# EAGLE board backplane_v4 (EAGLE 8.0.1)
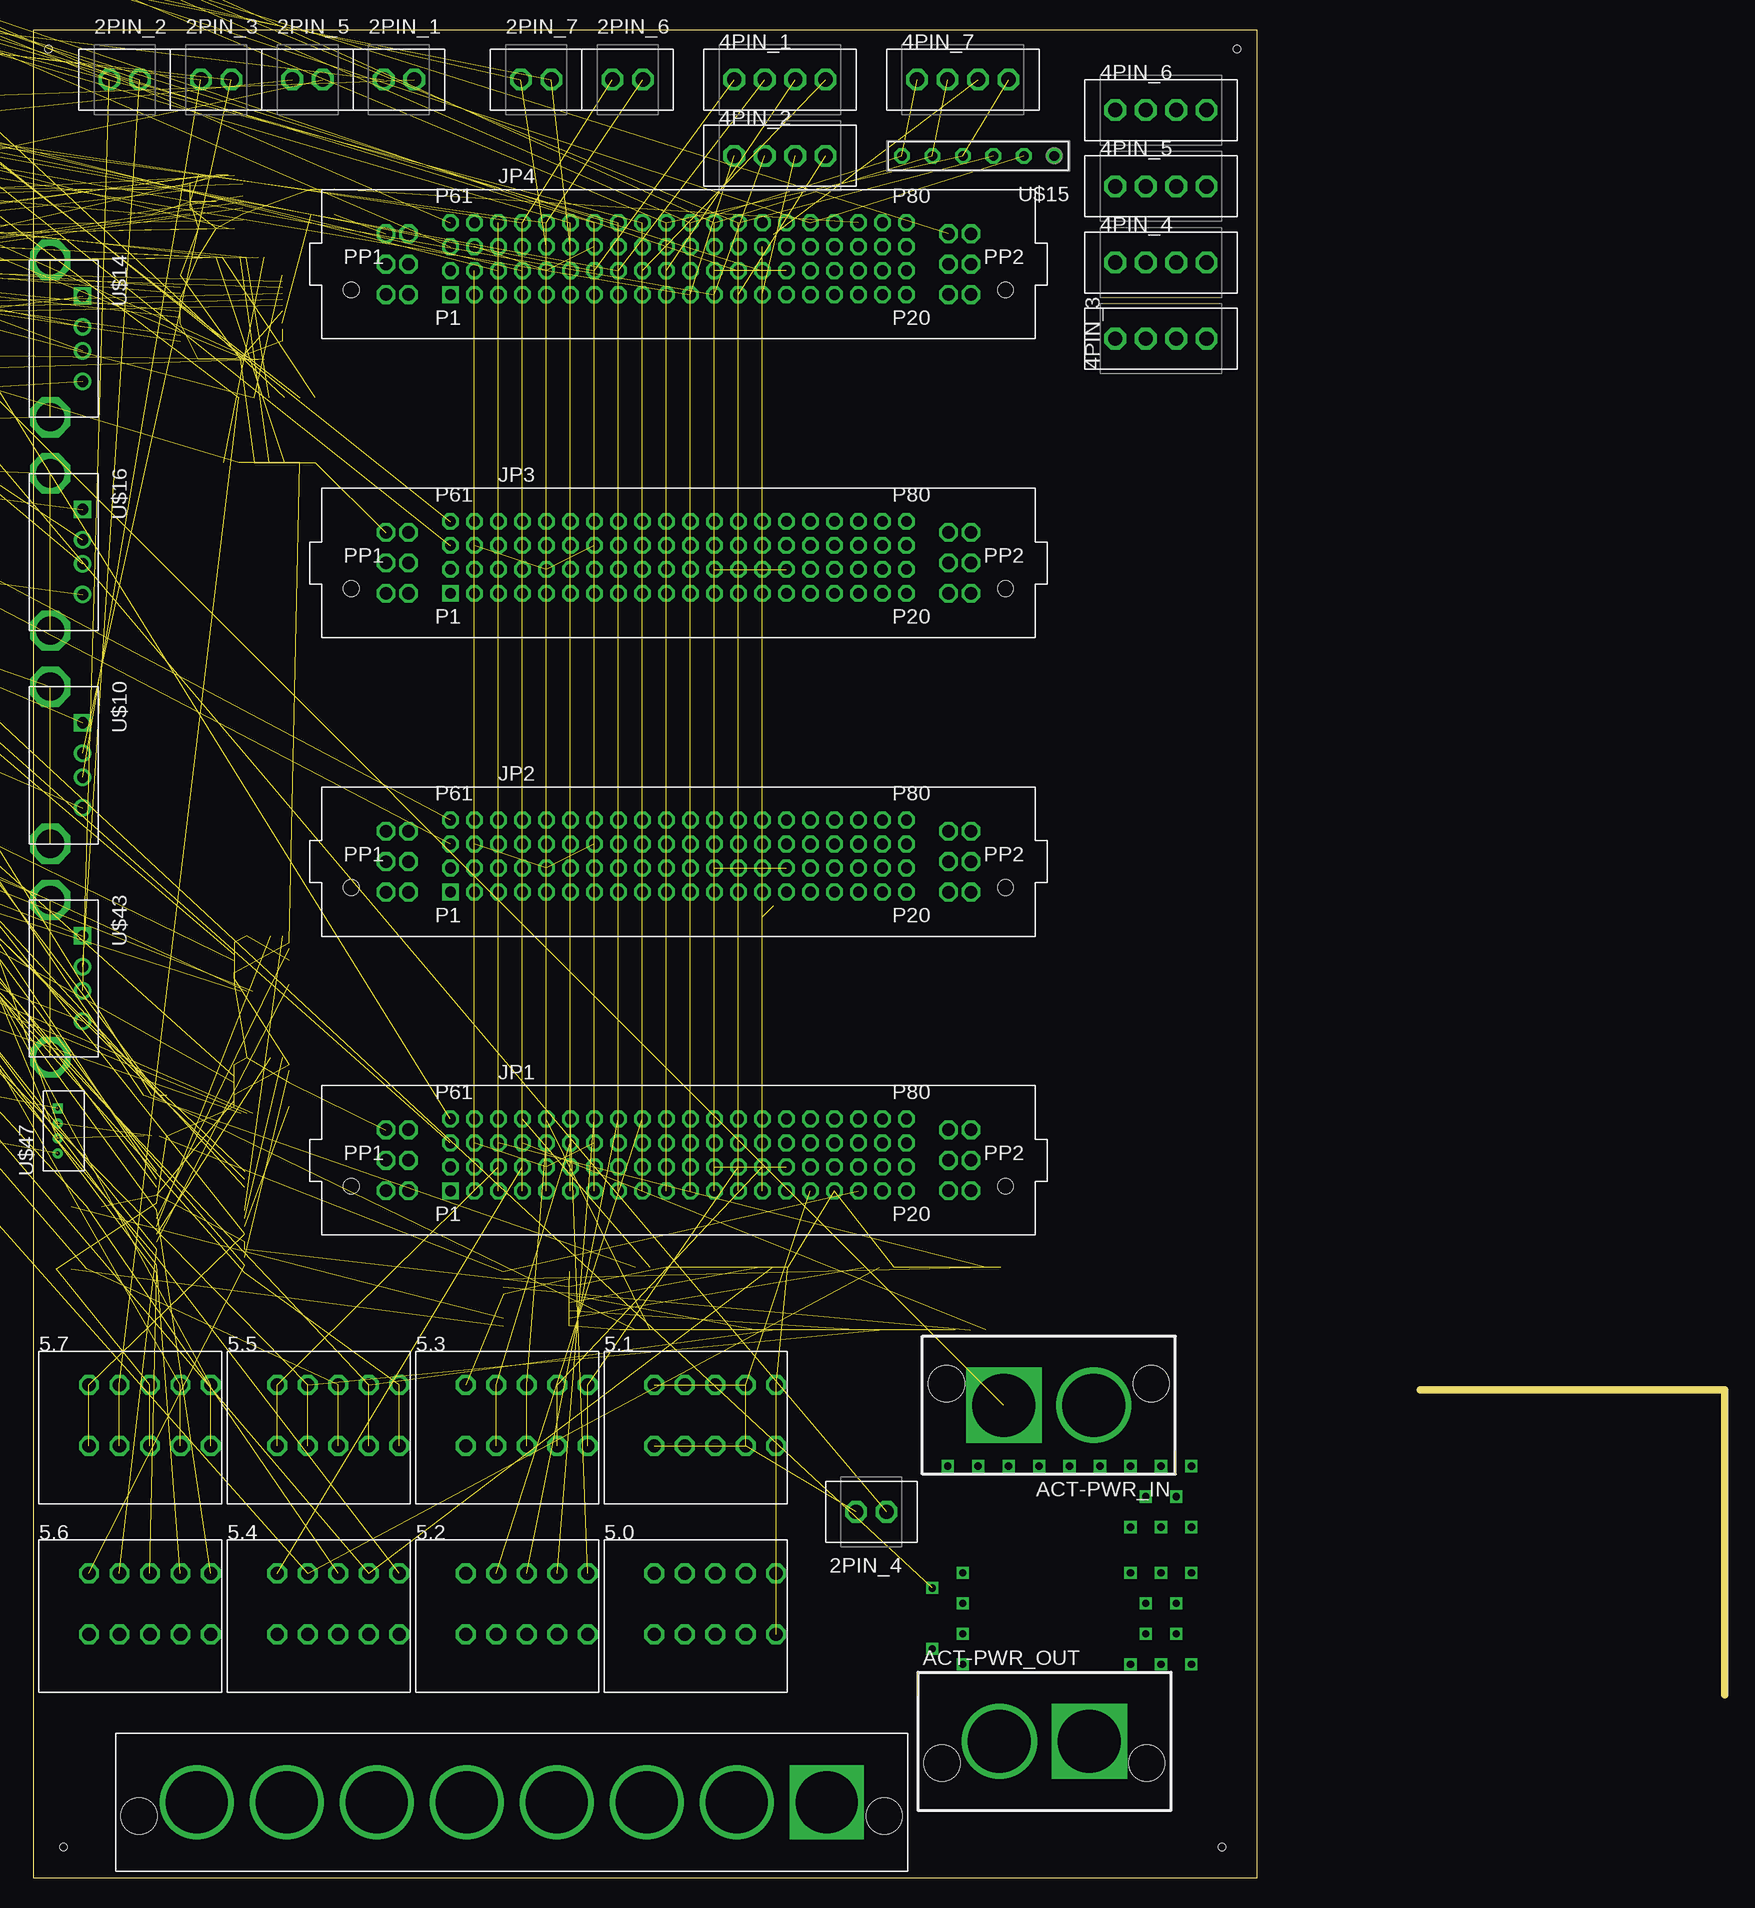
[diagram p0: board, top side]
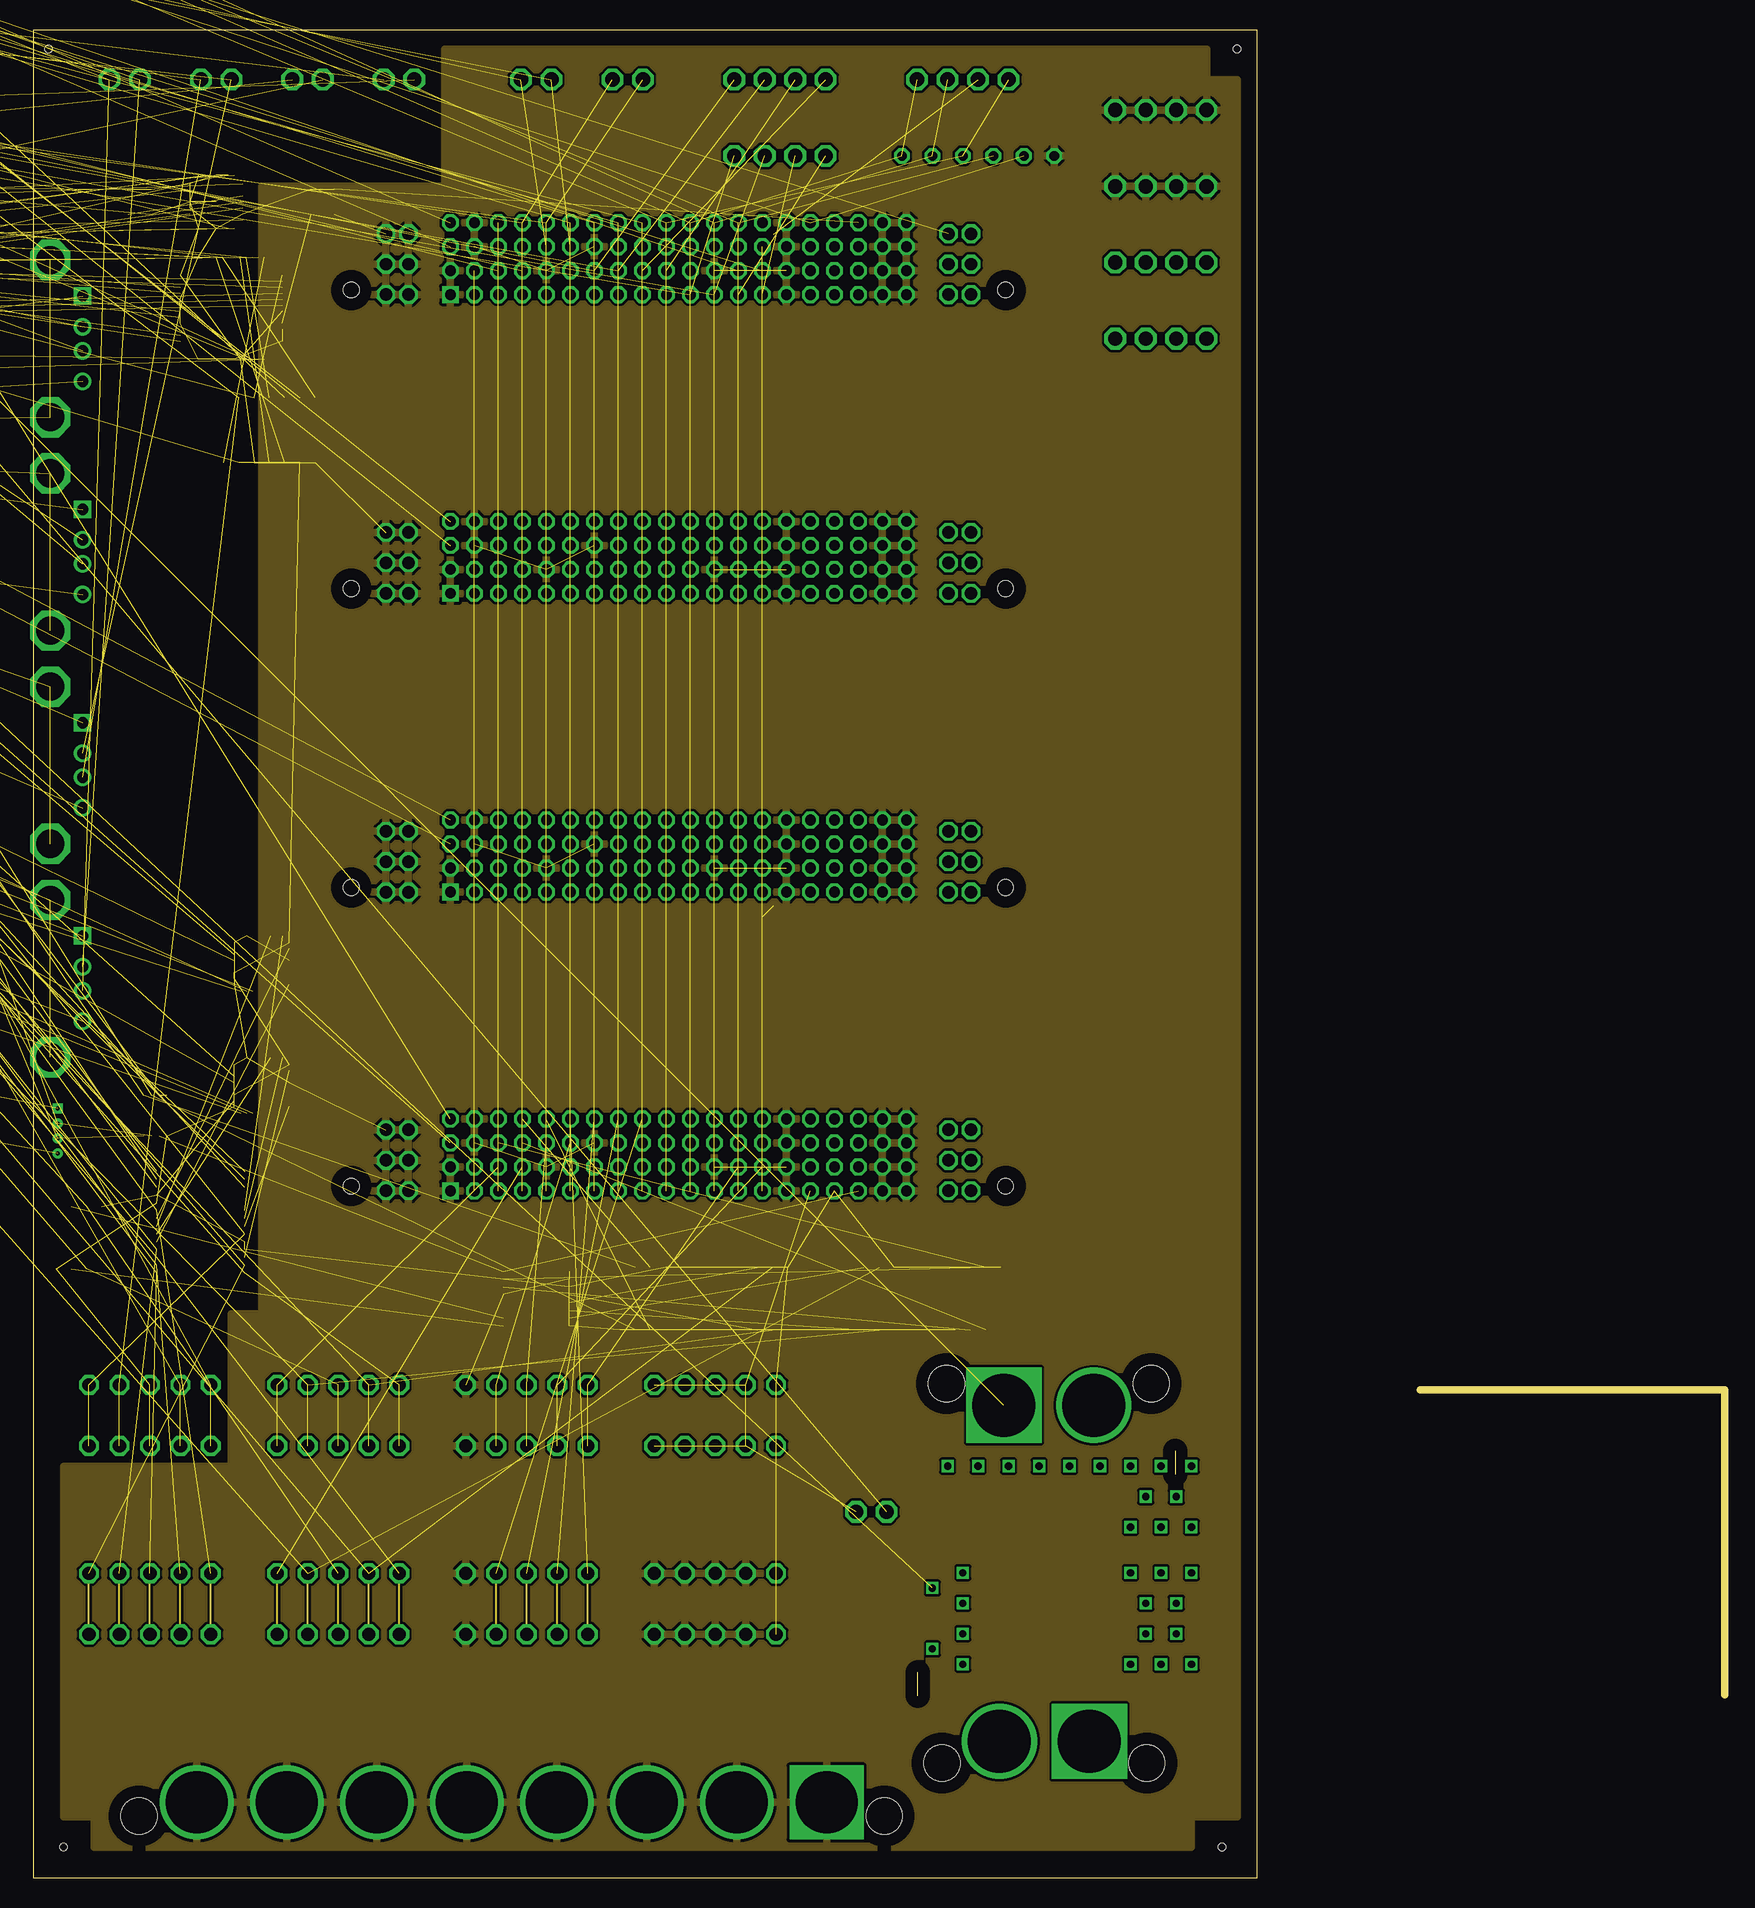
[diagram p1: board, inner layer Route2]
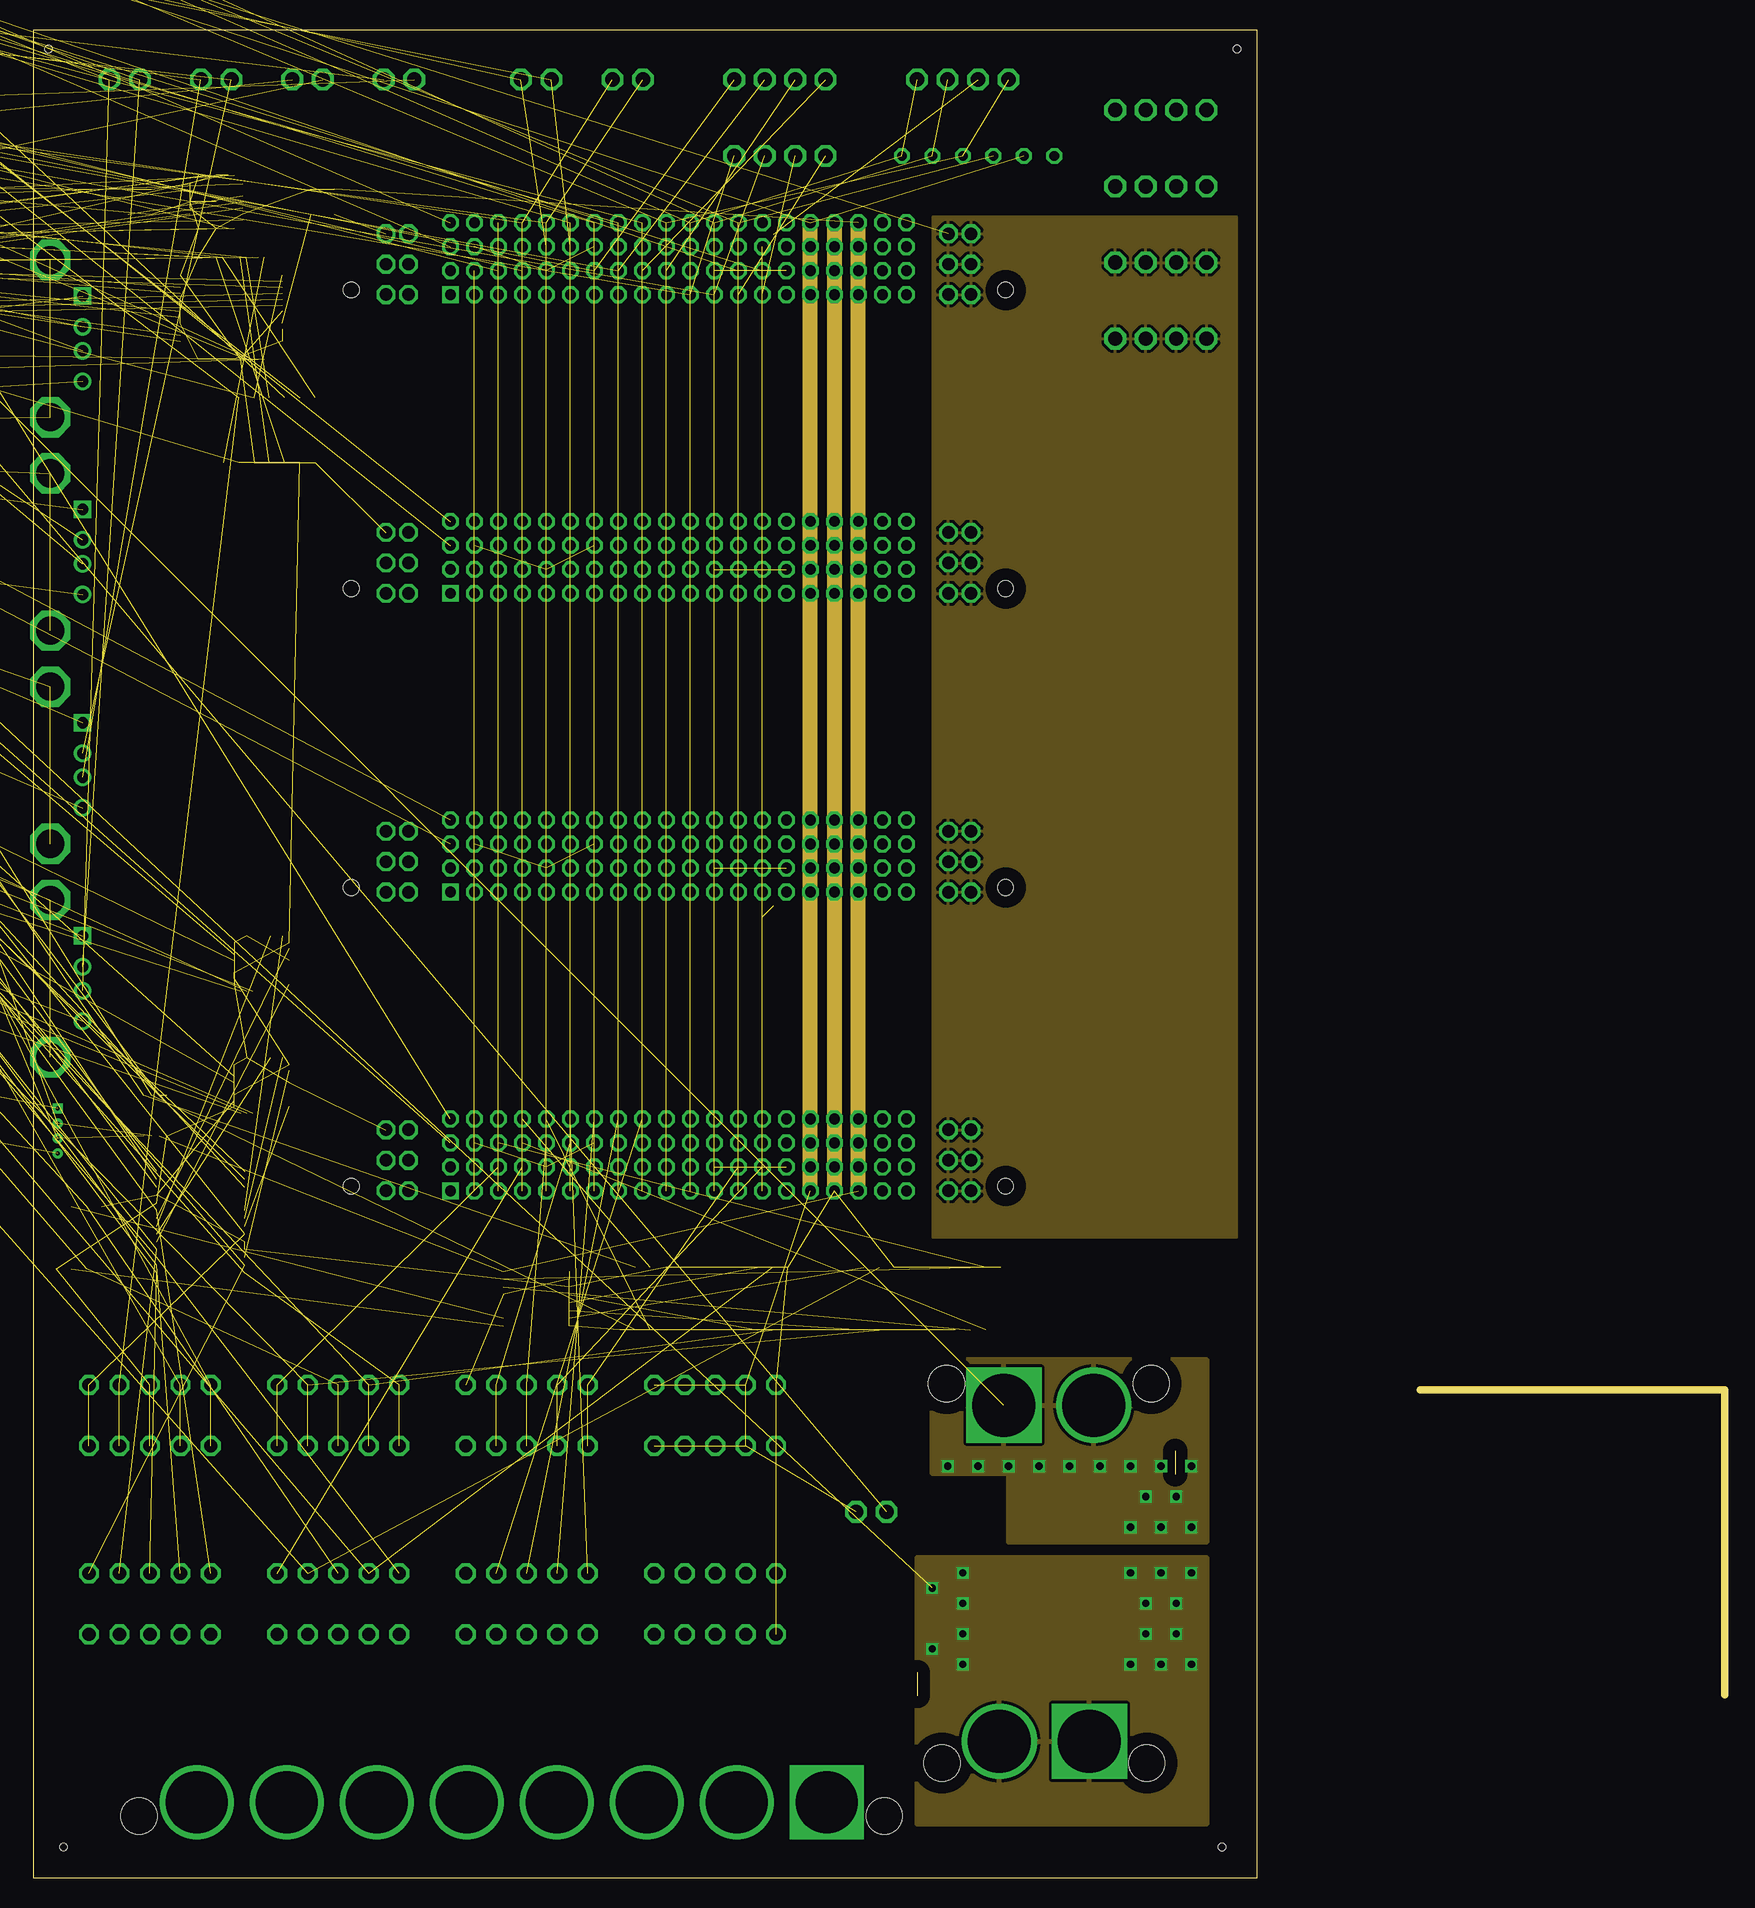
[diagram p2: board, inner layer Route15]
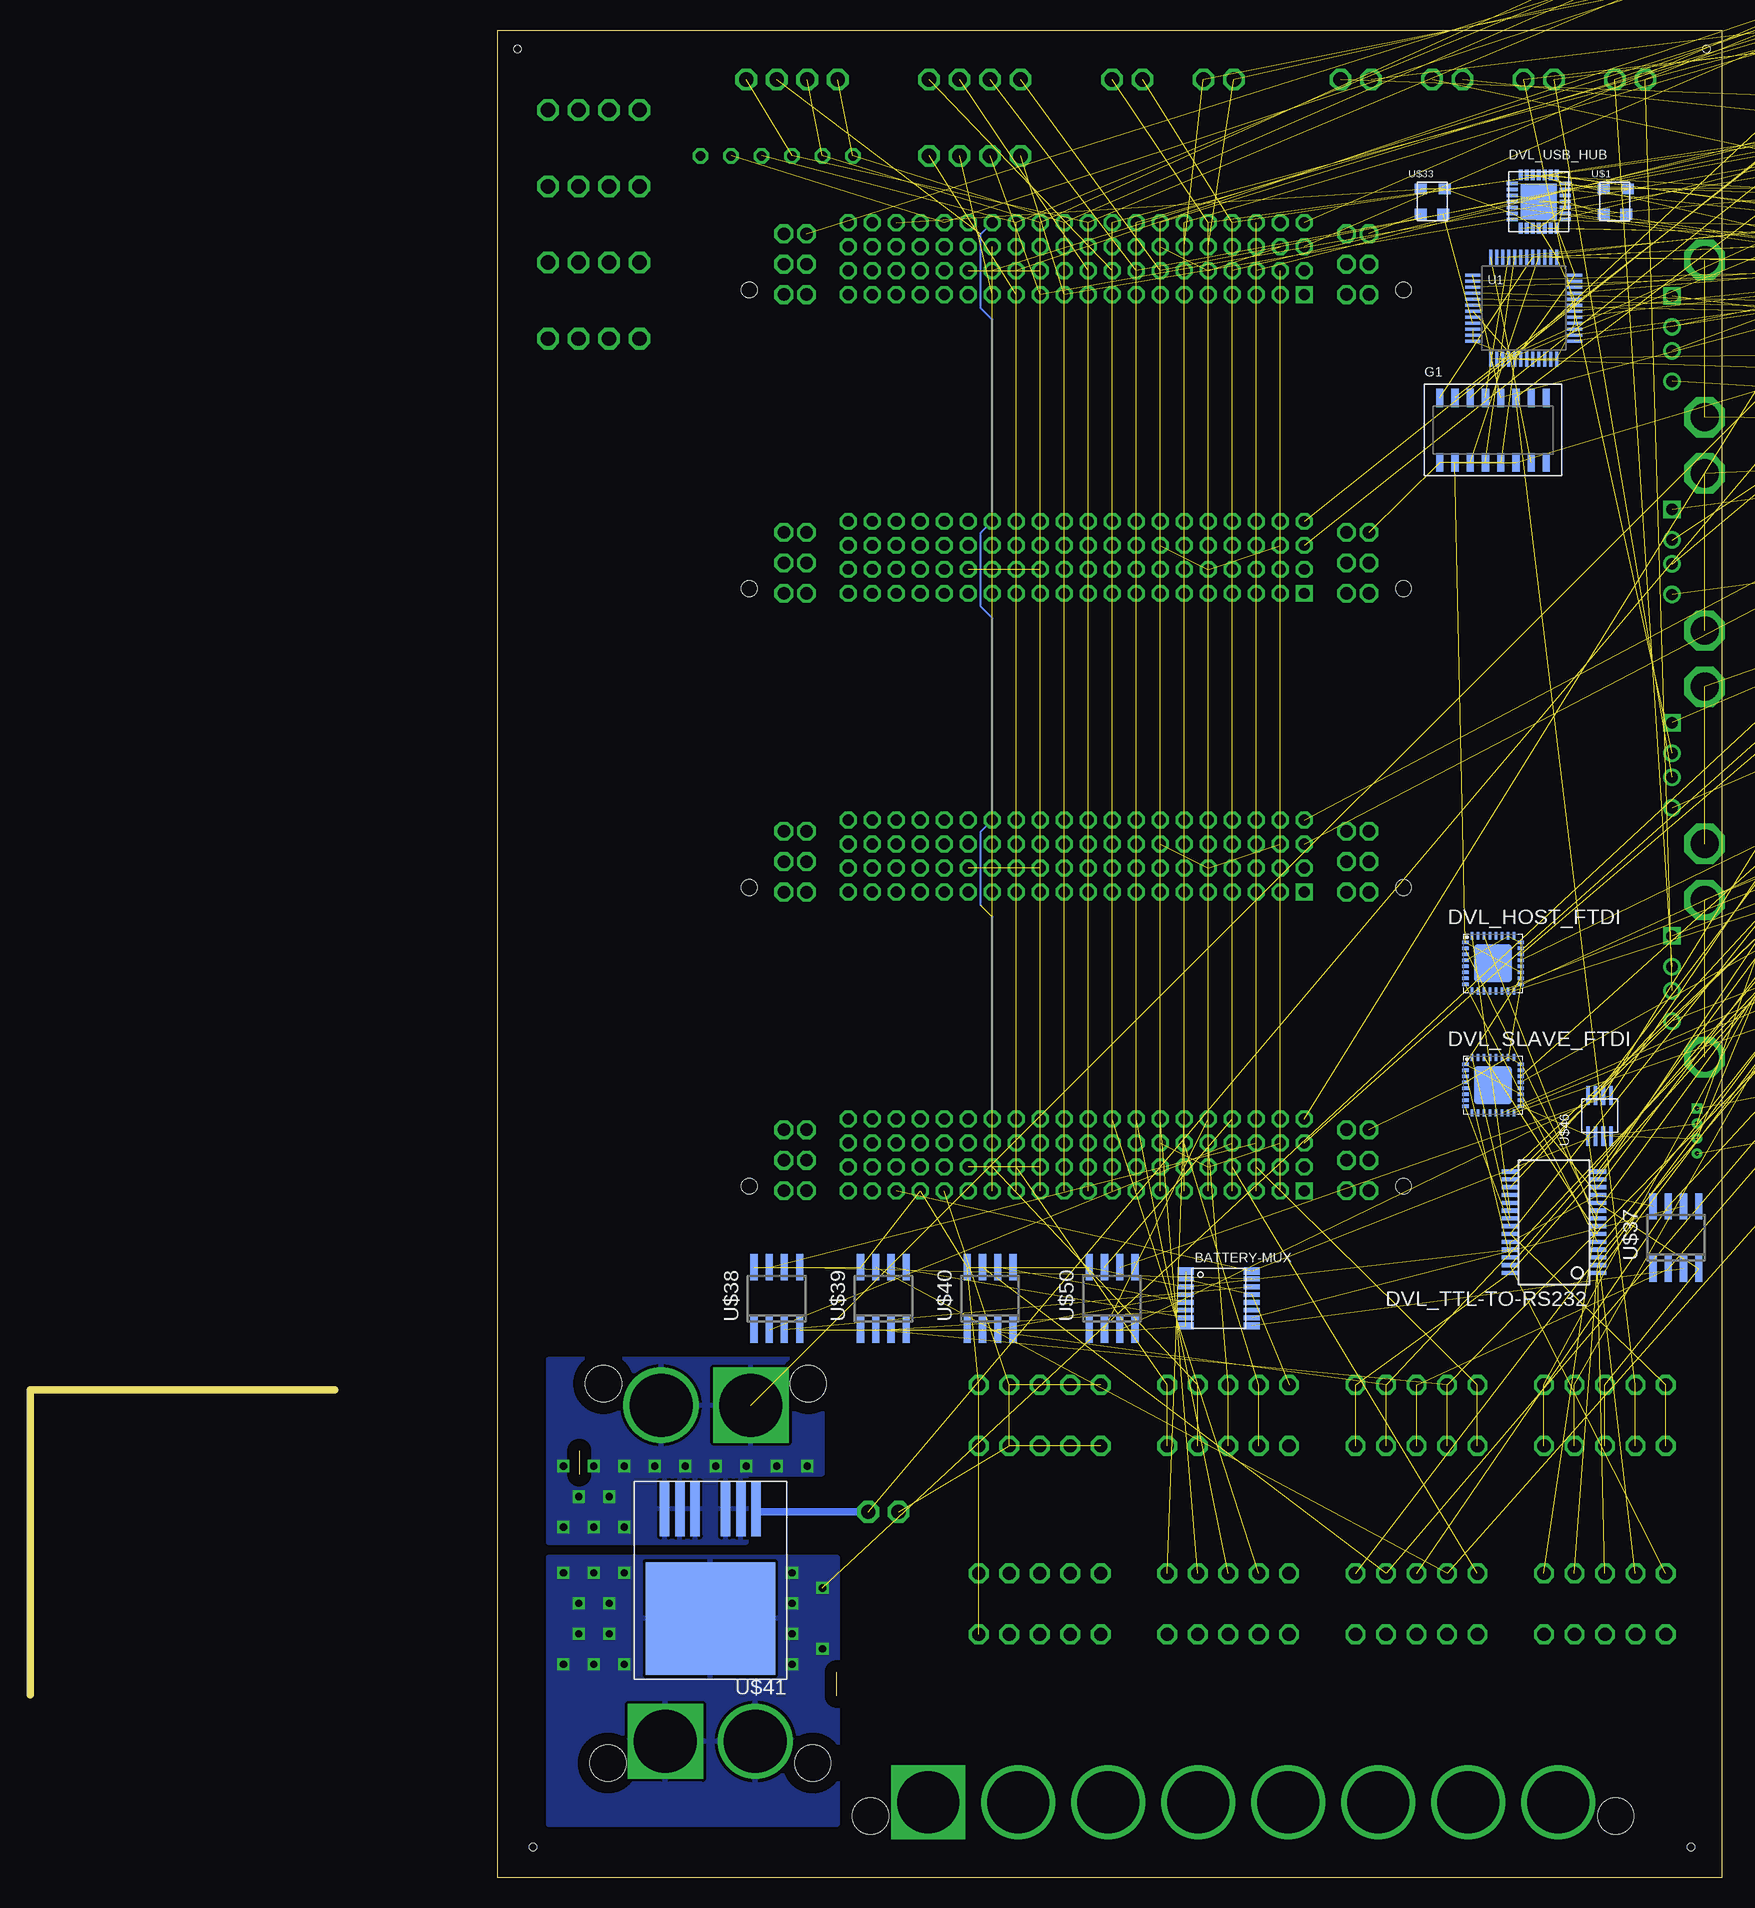
[diagram p3: board, bottom side, seen from below]

Size 140.97 x 154 mm. Coordinates in mm from the lower left corner, seen from the top.
Outline: 140.97,15.24 140.97,40.64 115.57,40.64
Outline: 0,0 102,0 102,154 0,154 0,0
Copper layers (1+2*15+16): Top 0.034290625mm / dielectric 9.5mil / Route2 0.034290625mm / dielectric 39mil / Route15 0.034290625mm / dielectric 9.5mil / Bottom 0.034290625mm
Design rules "default *": minimum track width 10mil, minimum drill 24mil, track to track 8mil, track to pad 8mil, pad to pad 8mil, via to via 8mil, smd to smd 8mil, copper to edge 40mil, drill to drill 8mil, minimum pad ring 10mil, minimum via ring 8mil, stop-mask expansion 4mil, vias tented up to drill 0mil, thermal gap 10mil
Net classes: 0 default: width 0.152 mm, clearance 0.152 mm; 1 low-pwr: width 0.381 mm, clearance 0.152 mm; 2 med-pwr: width 0.635 mm, clearance 0.254 mm; 3 high-pwr: width 1.27 mm, clearance 0.381 mm
Holes 0.6 mm at 2.54,2.54 99.06,2.54 100.33,152.4 1.27,152.4

## Footprints (pad centres in the part's own frame; a part is rotated, then mirrored left to right if it is on the bottom)
KK254_VERT_2PIN = drill 1.2 octagon: P$1 1.27,0; P$2 -1.27,0
KK254_VERT_4PIN = drill 1.2 octagon: P$1 3.81,0; P$2 1.27,0; P$3 -1.27,0; P$4 -3.81,0
M205_5PIN = drill 1.1 octagon: P$1 6.706,3.556; P$2 6.706,-1.524; P$3 4.166,3.556; P$4 4.166,-1.524; P$5 1.626,3.556; P$6 1.626,-1.524; P$7 -0.914,3.556; P$8 -0.914,-1.524; P$9 -3.454,3.556; P$10 -3.454,-1.524
SUPERSABRE_2CIRCUIT = drill 5.25: P$1 -3.747,0 | drill 5.25 square: P$2 3.747,0 | hole 2.997: -8.534,-1.803; 8.534,-1.803
TSSOP16 = smd 1.35 x 0.6: P$1 -2.75,2.275; P$8 -2.75,-2.275; P$9 2.75,-2.275; P$16 2.75,2.275 | smd 1.35 x 0.4: P$2 -2.75,1.625; P$3 -2.75,0.975; P$4 -2.75,0.325; P$5 -2.75,-0.325; P$6 -2.75,-0.975; P$7 -2.75,-1.625; P$10 2.75,-1.625; P$11 2.75,-0.975; P$12 2.75,-0.325; P$13 2.75,0.325; P$14 2.75,0.975; P$15 2.75,1.625
C0805 = smd 1.3 x 1.5: 1 -0.85,0; 2 0.85,0
SOD123 = smd 1.4 x 1.4: A 1.9,0; C -1.9,0
QFN32 = smd 0.6 x 0.3: 1 -2.3,1.75; 2 -2.3,1.25; 3 -2.3,0.75; 4 -2.3,0.25; 5 -2.3,-0.25; 6 -2.3,-0.75; 7 -2.3,-1.25; 8 -2.3,-1.75; 17 2.3,-1.75; 18 2.3,-1.25; 19 2.3,-0.75; 20 2.3,-0.25; 21 2.3,0.25; 22 2.3,0.75; 23 2.3,1.25; 24 2.3,1.75 | smd 0.3 x 0.6: 9 -1.75,-2.3; 10 -1.25,-2.3; 11 -0.75,-2.3; 12 -0.25,-2.3; 13 0.25,-2.3; 14 0.75,-2.3; 15 1.25,-2.3; 16 1.75,-2.3; 25 1.75,2.3; 26 1.25,2.3; 27 0.75,2.3; 28 0.25,2.3; 29 -0.25,2.3; 30 -0.75,2.3; 31 -1.25,2.3; 32 -1.75,2.3 | smd 3.2 x 3.2: EXP 0,0
SSOP28DB = smd 0.348 x 1.397: 1 -4.225,-3.656; 2 -3.575,-3.656; 3 -2.925,-3.656; 4 -2.275,-3.656; 5 -1.625,-3.656; 6 -0.975,-3.656; 7 -0.325,-3.656; 8 0.325,-3.656; 9 0.975,-3.656; 10 1.625,-3.656; 11 2.275,-3.656; 12 2.925,-3.656; 13 3.575,-3.656; 14 4.225,-3.656; 15 4.225,3.656; 16 3.575,3.656; 17 2.925,3.656; 18 2.275,3.656; 19 1.625,3.656; 20 0.975,3.656; 21 0.325,3.656; 22 -0.325,3.656; 23 -0.975,3.656; 24 -1.625,3.656; 25 -2.275,3.656; 26 -2.925,3.656; 27 -3.575,3.656; 28 -4.225,3.656
QFN-28 = smd 0.3 x 0.9: P$1 -1.5,-2.215; P$2 -1,-2.215; P$3 -0.5,-2.215; P$4 0,-2.215; P$5 0.5,-2.215; P$6 1,-2.215; P$7 1.5,-2.215; P$15 1.5,2.215; P$16 1,2.215; P$17 0.5,2.215; P$18 0,2.215; P$19 -0.5,2.215; P$20 -1,2.215; P$21 -1.5,2.215 | smd 0.9 x 0.3: P$8 2.215,-1.5; P$9 2.215,-1; P$10 2.215,-0.5; P$11 2.215,0; P$12 2.215,0.5; P$13 2.215,1; P$14 2.215,1.5; P$22 -2.215,1.5; P$23 -2.215,1; P$24 -2.215,0.5; P$25 -2.215,0; P$26 -2.215,-0.5; P$27 -2.215,-1; P$28 -2.215,-1.5 | smd 3 x 3: P$29 0,0
TPS2044 = smd 0.6 x 1.55: !EN1! -1.905,-2.7; !EN2! -0.635,-2.7; !EN3! 3.175,-2.7; !EN4! 4.445,-2.7; !OC1! -4.445,2.7; !OC2! -0.635,2.7; !OC3! 0.635,2.7; !OC4! 4.445,2.7; GND1 -4.445,-2.7; GND2 0.635,-2.7; IN1 -3.175,-2.7; IN2 1.905,-2.7; OUT1 -3.175,2.7; OUT2 -1.905,2.7; OUT3 1.905,2.7; OUT4 3.175,2.7
MPTC-01-80 = drill 0.9 square: 1 -19,-2.54 | drill 0.9 octagon: 2 -17,-2.54; 3 -15,-2.54; 4 -13,-2.54; 5 -11,-2.54; 6 -9,-2.54; 7 -7,-2.54; 8 -5,-2.54; 9 -3,-2.54; 10 -1,-2.54; 11 1,-2.54; 12 3,-2.54; 13 5,-2.54; 14 7,-2.54; 15 9,-2.54; 16 11,-2.54; 17 13,-2.54; 18 15,-2.54; 19 17,-2.54; 20 19,-2.54; 21 -19,-0.54; 22 -17,-0.54; 23 -15,-0.54; 24 -13,-0.54; 25 -11,-0.54; 26 -9,-0.54; 27 -7,-0.54; 28 -5,-0.54; 29 -3,-0.54; 30 -1,-0.54; 31 1,-0.54; 32 3,-0.54; 33 5,-0.54; 34 7,-0.54; 35 9,-0.54; 36 11,-0.54; 37 13,-0.54; 38 15,-0.54; 39 17,-0.54; 40 19,-0.54; 41 -19,1.46; 42 -17,1.46; 43 -15,1.46; 44 -13,1.46; 45 -11,1.46; 46 -9,1.46; 47 -7,1.46; 48 -5,1.46; 49 -3,1.46; 50 -1,1.46; 51 1,1.46; 52 3,1.46; 53 5,1.46; 54 7,1.46; 55 9,1.46; 56 11,1.46; 57 13,1.46; 58 15,1.46; 59 17,1.46; 60 19,1.46; 61 -19,3.46; 62 -17,3.46; 63 -15,3.46; 64 -13,3.46; 65 -11,3.46; 66 -9,3.46; 67 -7,3.46; 68 -5,3.46; 69 -3,3.46; 70 -1,3.46; 71 1,3.46; 72 3,3.46; 73 5,3.46; 74 7,3.46; 75 9,3.46; 76 11,3.46; 77 13,3.46; 78 15,3.46; 79 17,3.46; 80 19,3.46 | drill 1.04 octagon: P1,1 -22.5,-2.54; P1,2 -22.5,0; P1,3 -22.5,2.54; P1,4 -24.38,2.54; P1,5 -24.38,0; P1,6 -24.38,-2.54; P2,1 22.5,-2.54; P2,2 22.5,0; P2,3 22.5,2.54; P2,4 24.38,2.54; P2,5 24.38,0; P2,6 24.38,-2.54 | hole 1.3: -27.255,-2.15; 27.255,-2.15
CHIPLED_0805 = smd 1.2 x 1.2: A 0,-1.05; C 0,1.05
CHIP-LED0805 = smd 1.2 x 1.2: A 0,-1.05; C 0,1.05
R0805 = smd 1.3 x 1.5: 1 -0.85,0; 2 0.85,0
48-LQFP_0.5MM_PITCH = smd 0.25 x 1.25: P$1 -2.75,-4.25; P$2 -2.25,-4.25; P$3 -1.75,-4.25; P$4 -1.25,-4.25; P$5 -0.75,-4.25; P$6 -0.25,-4.25; P$7 0.25,-4.25; P$8 0.75,-4.25; P$9 1.25,-4.25; P$10 1.75,-4.25; P$11 2.25,-4.25; P$12 2.75,-4.25; P$25 2.75,4.25; P$26 2.25,4.25; P$27 1.75,4.25; P$28 1.25,4.25; P$29 0.75,4.25; P$30 0.25,4.25; P$31 -0.25,4.25; P$32 -0.75,4.25; P$33 -1.25,4.25; P$34 -1.75,4.25; P$35 -2.25,4.25; P$36 -2.75,4.25 | smd 1.25 x 0.25: P$13 4.25,-2.75; P$14 4.25,-2.25; P$15 4.25,-1.75; P$16 4.25,-1.25; P$17 4.25,-0.75; P$18 4.25,-0.25; P$19 4.25,0.25; P$20 4.25,0.75; P$21 4.25,1.25; P$22 4.25,1.75; P$23 4.25,2.25; P$24 4.25,2.75; P$37 -4.25,2.75; P$38 -4.25,2.25; P$39 -4.25,1.75; P$40 -4.25,1.25; P$41 -4.25,0.75; P$42 -4.25,0.25; P$43 -4.25,-0.25; P$44 -4.25,-0.75; P$45 -4.25,-1.25; P$46 -4.25,-1.75; P$47 -4.25,-2.25; P$48 -4.25,-2.75
4-CDFN_3.2X2.5MM = smd 1 x 0.9: P$1 -0.95,1.05; P$2 -0.95,-1.05; P$3 0.95,-1.05; P$4 1.05,1.05
SOT143B = smd 1 x 0.7: P$1 -0.75,-1.05 | smd 0.7 x 0.7: P$2 0.95,-1.05; P$3 0.9,1.05; P$4 -0.9,1.05
UE27AE54100 = drill 0.95: D+ 1,1.585; D- -1,1.585; GND 3.55,1.585 | drill 2.35 octagon: SHIELD -6.55,-1.125; SHIELD1 6.55,-1.125 | drill 0.95 square: VDD -3.55,1.585
0805 = smd 1.27 x 1.016: P$1 -0.889,0; P$2 0.889,0
1206 = smd 0.9 x 1.35: P$1 -1.484,0.011; P$2 1.394,0
MEMSENSE_NIMU = hole 1.778: 1.473,5.715; 1.473,17.145; 45.06,17.145; 45.06,5.715
KK254_6PIN = drill 0.8 octagon: P$1 -6.35,0; P$2 -3.81,0; P$3 -1.27,0; P$4 1.27,0; P$5 3.81,0; P$6 6.35,0
SO8 = smd 0.6 x 2.2: 1 -1.905,-2.6; 2 -0.635,-2.6; 3 0.635,-2.6; 4 1.905,-2.6; 5 1.905,2.6; 6 0.635,2.6; 7 -0.635,2.6; 8 -1.905,2.6
PG-TO263-7-3 = smd 10.8 x 9.4: DRAIN 0,0 | smd 0.8 x 4.6: GATE -3.81,-9.15; S1 -2.54,-9.15; S2 -1.27,-9.15; S3 1.27,-9.15; S4 2.54,-9.15; S5 3.81,-9.15
SM8 = smd 0.3 x 1.6: P$1 -0.975,-1.7; P$2 -0.34,-1.7; P$3 0.295,-1.7; P$4 0.93,-1.7; P$5 0.93,1.7; P$6 0.295,1.7; P$7 -0.34,1.7; P$8 -0.975,1.7
DF13-4 = drill 0.35 square: P$1 1.875,0.49 | drill 0.35: P$2 0.625,0.49; P$3 -0.625,0.49; P$4 -1.875,0.49
SUPERSABRE_8-PIN = drill 5.15 square: P$1 26.25,0 | drill 5.15: P$2 18.75,0; P$3 11.25,0; P$4 3.75,0; P$5 -3.75,0; P$6 -11.25,0; P$7 -18.75,0; P$8 -26.25,0 | hole 3: -31.05,-1.145; 31.05,-1.145

## Placement (x,y rotation side)
2PIN_1  CPU_USB_HUB  [KK254_VERT_2PIN]  30.48,149.86 0 top
2PIN_2  CPU_USB_AHRS  [KK254_VERT_2PIN]  7.62,149.86 0 top
2PIN_3  CPU_USB_IMU  [KK254_VERT_2PIN]  15.24,149.86 0 top
2PIN_4  Magnetic Reed Switch plug  [KK254_VERT_2PIN]  69.85,30.48 180 top
2PIN_5  CPU_USB_DVL  [KK254_VERT_2PIN]  22.86,149.86 0 top
2PIN_6  CPU_I2C_1  [KK254_VERT_2PIN]  49.53,149.86 0 top
2PIN_7  CPU_CAN  [KK254_VERT_2PIN]  41.91,149.86 0 top
4PIN_1  CPU_RS232_MCU  [KK254_VERT_4PIN]  62.23,149.86 0 top
4PIN_2  CPU_RS232_Flex  [KK254_VERT_4PIN]  62.23,143.51 0 top
4PIN_3  CPU_PWR1  [KK254_VERT_4PIN]  93.98,128.27 0 top
4PIN_4  CPU_PWR2  [KK254_VERT_4PIN]  93.98,134.62 0 top
4PIN_5  CPU_GND1  [KK254_VERT_4PIN]  93.98,140.97 0 top
4PIN_6  CPU_GND2  [KK254_VERT_4PIN]  93.98,147.32 0 top
4PIN_7  CPU_SPI  [KK254_VERT_4PIN]  77.47,149.86 0 top
5.0  M250_5PIN  [M205_5PIN]  55.2,21.8 0 top
5.1  M250_5PIN  [M205_5PIN]  55.2,37.5 0 top
5.2  M250_5PIN  [M205_5PIN]  39.5,21.8 0 top
5.3  M250_5PIN  [M205_5PIN]  39.5,37.5 0 top
5.4  M250_5PIN  [M205_5PIN]  23.8,21.8 0 top
5.5  M250_5PIN  [M205_5PIN]  23.8,37.5 0 top
5.6  M250_5PIN  [M205_5PIN]  8.1,21.8 0 top
5.7  M250_5PIN  [M205_5PIN]  8.1,37.5 0 top
ACT-PWR_IN  SUPERSABRE_2CIRCUIT  [SUPERSABRE_2CIRCUIT]  84.64,39.37 180 top
ACT-PWR_OUT  SUPERSABRE_2CIRCUIT  [SUPERSABRE_2CIRCUIT]  84.27,11.35 0 top
BATTERY-MUX  PCA9546APW  [TSSOP16]  41.91,48.26 0 bottom
C1  22p  [C0805]  -21.59,147.32 0 top  (outside the outline)
C2  22p  [C0805]  -26.67,147.32 0 top  (outside the outline)
C3  22p  [C0805]  -31.75,147.32 0 top  (outside the outline)
C4  100n  [C0805]  -127,120.65 0 top  (outside the outline)
C5  4.7u  [C0805]  -16.51,128.27 0 top  (outside the outline)
C6  100n  [C0805]  -133.35,120.65 0 top  (outside the outline)
C7  100n  [C0805]  -139.7,120.65 0 top  (outside the outline)
C8  100n  [C0805]  -146.05,120.65 0 top  (outside the outline)
C9  4.7u  [C0805]  -22.86,128.27 0 top  (outside the outline)
C10  100n  [C0805]  -152.4,120.65 0 top  (outside the outline)
C11  100n  [C0805]  -158.75,120.65 0 top  (outside the outline)
C16  0.1u  [C0805]  -29.21,128.27 0 top  (outside the outline)
C17  0.1u  [C0805]  -35.56,128.27 0 top  (outside the outline)
C18  0.1u  [C0805]  -41.91,128.27 0 top  (outside the outline)
C19  0.1u  [C0805]  -48.26,128.27 0 top  (outside the outline)
C20  0.1u  [C0805]  -54.61,128.27 0 top  (outside the outline)
C26  0.1u  [C0805]  -60.96,128.27 0 top  (outside the outline)
C27  0.1u  [C0805]  -67.31,128.27 0 top  (outside the outline)
C28  4.7u  [C0805]  -73.66,128.27 0 top  (outside the outline)
C29  0.1u  [C0805]  -80.01,128.27 0 top  (outside the outline)
C30  22p  [C0805]  -72.39,140.97 0 top  (outside the outline)
C31  22p  [C0805]  -77.47,140.97 0 top  (outside the outline)
C32  22p  [C0805]  -82.55,140.97 0 top  (outside the outline)
C33  22p  [C0805]  -87.63,140.97 0 top  (outside the outline)
C34  22p  [C0805]  -92.71,140.97 0 top  (outside the outline)
C35  22p  [C0805]  -97.79,140.97 0 top  (outside the outline)
C36  22p  [C0805]  -102.87,140.97 0 top  (outside the outline)
C37  22p  [C0805]  -107.95,140.97 0 top  (outside the outline)
C38  22p  [C0805]  -113.03,140.97 0 top  (outside the outline)
C39  22p  [C0805]  -118.11,140.97 0 top  (outside the outline)
C40  22p  [C0805]  -123.19,140.97 0 top  (outside the outline)
C41  22p  [C0805]  -128.27,140.97 0 top  (outside the outline)
C42  22p  [C0805]  -133.35,140.97 0 top  (outside the outline)
C43  22p  [C0805]  -138.43,140.97 0 top  (outside the outline)
C44  22p  [C0805]  -143.51,140.97 0 top  (outside the outline)
C45  22p  [C0805]  -148.59,140.97 0 top  (outside the outline)
C46  22p  [C0805]  -153.67,140.97 0 top  (outside the outline)
C47  22p  [C0805]  -158.75,140.97 0 top  (outside the outline)
C48  22p  [C0805]  -163.83,140.97 0 top  (outside the outline)
D1  14V  [SOD123]  -25.4,153.67 0 top  (outside the outline)
D2  5V  [SOD123]  -31.75,153.67 0 top  (outside the outline)
D3  5V  [SOD123]  -38.1,153.67 0 top  (outside the outline)
D4  12V  [SOD123]  -44.45,153.67 0 top  (outside the outline)
D5  12V  [SOD123]  -50.8,153.67 0 top  (outside the outline)
D6  12V  [SOD123]  -57.15,153.67 0 top  (outside the outline)
D7  12V  [SOD123]  -63.5,153.67 0 top  (outside the outline)
D8  V_BATT  [SOD123]  -55.88,147.32 0 top  (outside the outline)
D9  V_BATT  [SOD123]  -64.77,147.32 0 top  (outside the outline)
D10  5V  [SOD123]  -69.85,153.67 0 top  (outside the outline)
D11  12V  [SOD123]  -76.2,153.67 0 top  (outside the outline)
D12  5V  [SOD123]  -82.55,153.67 0 top  (outside the outline)
D13  3V3  [SOD123]  -88.9,153.67 0 top  (outside the outline)
D14  V_BATT  [SOD123]  -73.66,147.32 0 top  (outside the outline)
D15  12V  [SOD123]  -95.25,153.67 0 top  (outside the outline)
D16  5V  [SOD123]  -101.6,153.67 0 top  (outside the outline)
D17  3V3  [SOD123]  -107.95,153.67 0 top  (outside the outline)
D18  V_BATT  [SOD123]  -82.55,147.32 0 top  (outside the outline)
D19  12V  [SOD123]  -114.3,153.67 0 top  (outside the outline)
D20  5V  [SOD123]  -120.65,153.67 0 top  (outside the outline)
D21  3V3  [SOD123]  -127,153.67 0 top  (outside the outline)
D22  V_BATT  [SOD123]  -91.44,147.32 0 top  (outside the outline)
D23  12V  [SOD123]  -133.35,153.67 0 top  (outside the outline)
D24  5V  [SOD123]  -139.7,153.67 0 top  (outside the outline)
D25  3V3  [SOD123]  -146.05,153.67 0 top  (outside the outline)
D26  V_BATT  [SOD123]  -100.33,147.32 0 top  (outside the outline)
D27  12V  [SOD123]  -152.4,153.67 0 top  (outside the outline)
D28  V_BATT  [SOD123]  -109.22,147.32 0 top  (outside the outline)
D29  V_BATT  [SOD123]  -118.11,147.32 0 top  (outside the outline)
D30  V_BATT  [SOD123]  -127,147.32 0 top  (outside the outline)
D31  V_BATT  [SOD123]  -135.89,147.32 0 top  (outside the outline)
D32  V_BATT  [SOD123]  -144.78,147.32 0 top  (outside the outline)
D33  V_BATT  [SOD123]  -153.67,147.32 0 top  (outside the outline)
D34  V_BATT  [SOD123]  -162.56,147.32 0 top  (outside the outline)
D35  V_BATT  [SOD123]  -19.05,153.67 0 top  (outside the outline)
D36  5V  [SOD123]  -158.75,153.67 0 top  (outside the outline)
D37  5V  [SOD123]  -165.1,153.67 0 top  (outside the outline)
D39  5V  [SOD123]  -16.51,160.02 0 top  (outside the outline)
D40  5V  [SOD123]  -22.86,160.02 0 top  (outside the outline)
D41  5V  [SOD123]  -29.21,160.02 0 top  (outside the outline)
DVL_HOST_FTDI  FT232RQ  [QFN32]  19.05,76.2 0 bottom
DVL_SLAVE_FTDI  FT232RQ  [QFN32]  19.05,66.04 0 bottom
DVL_TTL-TO-RS232  MAX213CDBR  [SSOP28DB]  13.97,54.61 90 bottom
DVL_USB_HUB  USB2412-DZK  [QFN-28]  15.24,139.7 0 bottom
G1  TPS2044BBD-SOIC  [TPS2044]  19.05,120.65 0 bottom
JP1  MPTC-01-80  [MPTC-01-80]  53.77,59.78 0 top
JP2  MPTC-01-80  [MPTC-01-80]  53.77,84.68 0 top
JP3  MPTC-01-80  [MPTC-01-80]  53.77,109.58 0 top
JP4  MPTC-01-80  [MPTC-01-80]  53.77,134.48 0 top
LED1  Red  [CHIPLED_0805]  -87.63,165.1 0 top  (outside the outline)
LED2  Green  [CHIPLED_0805]  -73.66,119.38 0 top  (outside the outline)
LED3  Red  [CHIPLED_0805]  -93.98,165.1 0 top  (outside the outline)
LED4  Green  [CHIPLED_0805]  -80.01,119.38 0 top  (outside the outline)
LED7  Green  [CHIPLED_0805]  -86.36,119.38 0 top  (outside the outline)
LED8  Green  [CHIP-LED0805]  -92.71,119.38 0 top  (outside the outline)
LED9  Red  [CHIP-LED0805]  -100.33,165.1 0 top  (outside the outline)
LED10  Red  [CHIP-LED0805]  -35.56,119.38 0 top  (outside the outline)
LED11  Green  [CHIP-LED0805]  -41.91,119.38 0 top  (outside the outline)
LED12  Red  [CHIP-LED0805]  -48.26,119.38 0 top  (outside the outline)
LED13  Green  [CHIP-LED0805]  -54.61,119.38 0 top  (outside the outline)
LED14  Red  [CHIP-LED0805]  -60.96,119.38 0 top  (outside the outline)
LED15  Green  [CHIP-LED0805]  -67.31,119.38 0 top  (outside the outline)
R1  200k  [R0805]  -120.65,120.65 0 top  (outside the outline)
R2  15k  [R0805]  -16.51,147.32 0 top  (outside the outline)
R3  27  [R0805]  -36.83,147.32 0 top  (outside the outline)
R4  270  [R0805]  -52.07,140.97 0 top  (outside the outline)
R5  270  [R0805]  -57.15,140.97 0 top  (outside the outline)
R6  270  [R0805]  -62.23,140.97 0 top  (outside the outline)
R7  270  [R0805]  -67.31,140.97 0 top  (outside the outline)
R8  5k  [R0805]  -41.91,147.32 0 top  (outside the outline)
R9  5k  [R0805]  -46.99,147.32 0 top  (outside the outline)
R10  50k  [R0805]  -85.09,128.27 0 top  (outside the outline)
R11  50k  [R0805]  -90.17,128.27 0 top  (outside the outline)
R12  12k+/-1%  [R0805]  -114.3,120.65 0 top  (outside the outline)
R13  100>R>40  [R0805]  -104.14,120.65 0 top  (outside the outline)
R14  50k  [R0805]  -95.25,128.27 0 top  (outside the outline)
R15  50k  [R0805]  -100.33,128.27 0 top  (outside the outline)
R16  1.5k  [R0805]  -165.1,120.65 0 top  (outside the outline)
R17  27  [R0805]  -105.41,128.27 0 top  (outside the outline)
R18  330  [R0805]  -110.49,128.27 0 top  (outside the outline)
R19  330  [R0805]  -115.57,128.27 0 top  (outside the outline)
R20  330  [R0805]  -120.65,128.27 0 top  (outside the outline)
R21  330  [R0805]  -125.73,128.27 0 top  (outside the outline)
R22  27  [R0805]  -130.81,128.27 0 top  (outside the outline)
R23  27  [R0805]  -135.89,128.27 0 top  (outside the outline)
R24  27  [R0805]  -140.97,128.27 0 top  (outside the outline)
R25  27  [R0805]  -146.05,128.27 0 top  (outside the outline)
R26  27  [R0805]  -151.13,128.27 0 top  (outside the outline)
R27  27  [R0805]  -156.21,128.27 0 top  (outside the outline)
R28  27  [R0805]  -161.29,128.27 0 top  (outside the outline)
R29  27  [R0805]  -166.37,128.27 0 top  (outside the outline)
R30  27  [R0805]  -16.51,134.62 0 top  (outside the outline)
R31  27  [R0805]  -21.59,134.62 0 top  (outside the outline)
R32  27  [R0805]  -26.67,134.62 0 top  (outside the outline)
R33  27  [R0805]  -31.75,134.62 0 top  (outside the outline)
R34  27  [R0805]  -36.83,134.62 0 top  (outside the outline)
R35  27  [R0805]  -41.91,134.62 0 top  (outside the outline)
R36  15k  [R0805]  -46.99,134.62 0 top  (outside the outline)
R37  15k  [R0805]  -52.07,134.62 0 top  (outside the outline)
R38  15k  [R0805]  -57.15,134.62 0 top  (outside the outline)
R39  15k  [R0805]  -62.23,134.62 0 top  (outside the outline)
R40  15k  [R0805]  -67.31,134.62 0 top  (outside the outline)
R41  15k  [R0805]  -72.39,134.62 0 top  (outside the outline)
R42  15k  [R0805]  -77.47,134.62 0 top  (outside the outline)
R43  15k  [R0805]  -82.55,134.62 0 top  (outside the outline)
R44  15k  [R0805]  -87.63,134.62 0 top  (outside the outline)
R45  15k  [R0805]  -92.71,134.62 0 top  (outside the outline)
R46  15k  [R0805]  -97.79,134.62 0 top  (outside the outline)
R47  15k  [R0805]  -102.87,134.62 0 top  (outside the outline)
R48  15k  [R0805]  -107.95,134.62 0 top  (outside the outline)
R49  27  [R0805]  -113.03,134.62 0 top  (outside the outline)
R50  15k  [R0805]  -118.11,134.62 0 top  (outside the outline)
R51  27  [R0805]  -123.19,134.62 0 top  (outside the outline)
R52  15k  [R0805]  -128.27,134.62 0 top  (outside the outline)
R53  27  [R0805]  -133.35,134.62 0 top  (outside the outline)
R54  15k  [R0805]  -138.43,134.62 0 top  (outside the outline)
R55  27  [R0805]  -143.51,134.62 0 top  (outside the outline)
R56  15k  [R0805]  -148.59,134.62 0 top  (outside the outline)
R57  27  [R0805]  -153.67,134.62 0 top  (outside the outline)
R58  15k  [R0805]  -158.75,134.62 0 top  (outside the outline)
R59  27  [R0805]  -163.83,134.62 0 top  (outside the outline)
R60  15k  [R0805]  -16.51,140.97 0 top  (outside the outline)
R61  50k  [R0805]  -21.59,140.97 0 top  (outside the outline)
R62  5k  [R0805]  -26.67,140.97 0 top  (outside the outline)
R63  5k  [R0805]  -31.75,140.97 0 top  (outside the outline)
R64  15k  [R0805]  -36.83,140.97 0 top  (outside the outline)
R65  15k  [R0805]  -41.91,140.97 0 top  (outside the outline)
R66  15k  [R0805]  -46.99,140.97 0 top  (outside the outline)
U1  TUSB2077ALQFP  [48-LQFP_0.5MM_PITCH]  16.51,130.81 0 bottom
U$1  24MHz  [4-CDFN_3.2X2.5MM]  8.89,139.7 0 bottom
U$2  PRTR5V0U2X  [SOT143B]  -105.41,165.1 0 top  (outside the outline)
U$3  PRTR5V0U2X  [SOT143B]  -110.49,165.1 0 top  (outside the outline)
U$4  PRTR5V0U2X  [SOT143B]  -115.57,165.1 0 top  (outside the outline)
U$5  PRTR5V0U2X  [SOT143B]  -120.65,165.1 0 top  (outside the outline)
U$6  PRTR5V0U2X  [SOT143B]  -125.73,165.1 0 top  (outside the outline)
U$7  PRTR5V0U2X  [SOT143B]  -130.81,165.1 0 top  (outside the outline)
U$8  PRTR5V0U2X  [SOT143B]  -135.89,165.1 0 top  (outside the outline)
U$9  PRTR5V0U2X  [SOT143B]  -140.97,165.1 0 top  (outside the outline)
U$10  IMU USB header  [UE27AE54100]  2.54,92.71 270 top
U$11  [0805]  -116.84,170.18 0 top  (outside the outline)
U$12  100u_tant  [1206]  -34.29,160.02 0 top  (outside the outline)
U$13  MEMSENSE_NIMU  [MEMSENSE_NIMU]  -39.37,52.07 90 top  (outside the outline)
U$14  [UE27AE54100]  2.54,128.27 270 top
U$15  SPI_LEDS  [KK254_6PIN]  78.74,143.51 180 top
U$16  [UE27AE54100]  2.54,110.49 270 top
U$17  [R0805]  -184.15,176.53 0 top  (outside the outline)
U$18  PRTR5V0U2X  [SOT143B]  -146.05,165.1 0 top  (outside the outline)
U$19  PRTR5V0U2X  [SOT143B]  -151.13,165.1 0 top  (outside the outline)
U$20  PRTR5V0U2X  [SOT143B]  -156.21,165.1 0 top  (outside the outline)
U$21  [R0805]  -184.15,170.18 0 top  (outside the outline)
U$22  PRTR5V0U2X  [SOT143B]  -161.29,165.1 0 top  (outside the outline)
U$23  PRTR5V0U2X  [SOT143B]  -15.24,171.45 0 top  (outside the outline)
U$24  [0805]  -121.92,170.18 0 top  (outside the outline)
U$25  [0805]  -127,170.18 0 top  (outside the outline)
U$26  [R0805]  -184.15,163.83 0 top  (outside the outline)
U$27  PRTR5V0U2X  [SOT143B]  -20.32,171.45 0 top  (outside the outline)
U$28  PRTR5V0U2X  [SOT143B]  -25.4,171.45 0 top  (outside the outline)
U$29  PRTR5V0U2X  [SOT143B]  -30.48,171.45 0 top  (outside the outline)
U$30  PRTR5V0U2X  [SOT143B]  -35.56,171.45 0 top  (outside the outline)
U$31  PRTR5V0U2X  [SOT143B]  -40.64,171.45 0 top  (outside the outline)
U$32  PRTR5V0U2X  [SOT143B]  -45.72,171.45 0 top  (outside the outline)
U$33  48MHz  [4-CDFN_3.2X2.5MM]  24.13,139.7 0 bottom
U$34  100u_tant  [1206]  -39.37,160.02 0 top  (outside the outline)
U$35  100u_tant  [1206]  -44.45,160.02 0 top  (outside the outline)
U$36  [R0805]  -184.15,157.48 0 top  (outside the outline)
U$37  P82B715  [SO8]  3.81,53.34 0 bottom
U$38  P82B715  [SO8]  78.74,48.26 0 bottom
U$39  P82B715  [SO8]  69.85,48.26 0 bottom
U$40  P82B715  [SO8]  60.96,48.26 0 bottom
U$41  IPB180P04P4L-02  [PG-TO263-7-3]  84.27,21.59 180 bottom
U$42  PRTR5V0U2X  [SOT143B]  -50.8,171.45 0 top  (outside the outline)
U$43  AHRS USB header  [UE27AE54100]  2.54,74.93 270 top
U$44  [0805]  -132.08,170.18 0 top  (outside the outline)
U$45  100u_tant  [1206]  -49.53,160.02 0 top  (outside the outline)
U$46  I2C level shifter  [SM8]  10.16,63.5 0 bottom
U$47  Depth Sensor header  [DF13-4]  2.54,62.23 90 top
U$48  [0805]  -137.16,170.18 0 top  (outside the outline)
U$49  100u_tant  [1206]  -54.61,160.02 0 top  (outside the outline)
U$50  P82B715  [SO8]  50.8,48.26 0 bottom
U$51  100u_tant  [1206]  -59.69,160.02 0 top  (outside the outline)
U$52  PRTR5V0U2X  [SOT143B]  -55.88,171.45 0 top  (outside the outline)
U$53  PRTR5V0U2X  [SOT143B]  -60.96,171.45 0 top  (outside the outline)
U$54  PRTR5V0U2X  [SOT143B]  -66.04,171.45 0 top  (outside the outline)
U$55  PRTR5V0U2X  [SOT143B]  -71.12,171.45 0 top  (outside the outline)
U$56  PRTR5V0U2X  [SOT143B]  -76.2,171.45 0 top  (outside the outline)
U$57  PRTR5V0U2X  [SOT143B]  -81.28,171.45 0 top  (outside the outline)
U$58  PRTR5V0U2X  [SOT143B]  -86.36,171.45 0 top  (outside the outline)
U$59  PRTR5V0U2X  [SOT143B]  -91.44,171.45 0 top  (outside the outline)
U$60  PRTR5V0U2X  [SOT143B]  -96.52,171.45 0 top  (outside the outline)
U$61  PRTR5V0U2X  [SOT143B]  -101.6,171.45 0 top  (outside the outline)
U$62  PRTR5V0U2X  [SOT143B]  -106.68,171.45 0 top  (outside the outline)
U$63  PRTR5V0U2X  [SOT143B]  -111.76,171.45 0 top  (outside the outline)
U$64  0.1u_tant  [1206]  -64.77,160.02 0 top  (outside the outline)
U$65  0.1u_tant  [1206]  -69.85,160.02 0 top  (outside the outline)
U$66  0.1u_tant  [1206]  -74.93,160.02 0 top  (outside the outline)
U$67  0.1u_tant  [1206]  -80.01,160.02 0 top  (outside the outline)
U$68  [0805]  -142.24,170.18 0 top  (outside the outline)
U$69  100u_tant  [1206]  -85.09,160.02 0 top  (outside the outline)
U$70  0.1u_tant  [1206]  -90.17,160.02 0 top  (outside the outline)
U$71  0.1u_tant  [1206]  -95.25,160.02 0 top  (outside the outline)
U$72  0.1u_tant  [1206]  -100.33,160.02 0 top  (outside the outline)
U$73  0.1u_tant  [1206]  -105.41,160.02 0 top  (outside the outline)
U$74  [R0805]  -184.15,151.13 0 top  (outside the outline)
U$75  0.1u_tant  [1206]  -110.49,160.02 0 top  (outside the outline)
U$76  0.1u_tant  [1206]  -115.57,160.02 0 top  (outside the outline)
U$77  0.1u_tant  [1206]  -120.65,160.02 0 top  (outside the outline)
U$78  0.1u_tant  [1206]  -125.73,160.02 0 top  (outside the outline)
U$79  0.1u_tant  [1206]  -130.81,160.02 0 top  (outside the outline)
U$80  0.1u_tant  [1206]  -135.89,160.02 0 top  (outside the outline)
U$81  0.1u_tant  [1206]  -140.97,160.02 0 top  (outside the outline)
U$82  0.1u_tant  [1206]  -146.05,160.02 0 top  (outside the outline)
U$83  0.1u_tant  [1206]  -151.13,160.02 0 top  (outside the outline)
U$84  0.1u_tant  [1206]  -156.21,160.02 0 top  (outside the outline)
U$85  0.1u_tant  [1206]  -161.29,160.02 0 top  (outside the outline)
U$86  0.1u_tant  [1206]  -15.24,166.37 0 top  (outside the outline)
U$87  0.1u_tant  [1206]  -20.32,166.37 0 top  (outside the outline)
U$88  0.1u_tant  [1206]  -25.4,166.37 0 top  (outside the outline)
U$89  0.1u_tant  [1206]  -30.48,166.37 0 top  (outside the outline)
U$90  0.1u_tant  [1206]  -35.56,166.37 0 top  (outside the outline)
U$91  0.1u_tant  [1206]  -40.64,166.37 0 top  (outside the outline)
U$92  0.1u_tant  [1206]  -45.72,166.37 0 top  (outside the outline)
U$93  0.1u_tant  [1206]  -50.8,166.37 0 top  (outside the outline)
U$94  0.1u_tant  [1206]  -55.88,166.37 0 top  (outside the outline)
U$95  0.1u_tant  [1206]  -60.96,166.37 0 top  (outside the outline)
U$96  0.1u_tant  [1206]  -66.04,166.37 0 top  (outside the outline)
U$97  0.1u_tant  [1206]  -71.12,166.37 0 top  (outside the outline)
U$98  0.1u_tant  [1206]  -76.2,166.37 0 top  (outside the outline)
U$99  0.1u_tant  [1206]  -81.28,166.37 0 top  (outside the outline)
U$100  SYSTEM GROUND  [SUPERSABRE_8-PIN]  39.87,6.26 0 top
U$101  [R0805]  -184.15,144.78 0 top  (outside the outline)
U$102  [R0805]  -184.15,138.43 0 top  (outside the outline)
U$103  [R0805]  -184.15,132.08 0 top  (outside the outline)
U$104  [R0805]  -184.15,125.73 0 top  (outside the outline)
U$105  [R0805]  -184.15,119.38 0 top  (outside the outline)
U$106  [R0805]  -184.15,113.03 0 top  (outside the outline)
U$107  [R0805]  -184.15,106.68 0 top  (outside the outline)
U$108  [R0805]  -184.15,100.33 0 top  (outside the outline)
U$109  [R0805]  -184.15,93.98 0 top  (outside the outline)

## Library data of the parts
2PIN_1-2PIN_7 4PIN_1-4PIN_7 5.0 5.1-5.7 ACT-PWR_IN ACT-PWR_OUT U$15 U$100 = molex
BATTERY-MUX U$2-U$9 U$18-U$20 U$22 U$23 U$27-U$32 U$37-U$40 U$42 U$50 U$52-U$63 = NXP
C1-C11 C16-C20 C26-C48 R1-R66 U$17 U$21 U$26 U$36 U$74 U$101-U$109 = resistor
D1-D37 D39-D41 = diode
DVL_HOST_FTDI DVL_SLAVE_FTDI = ftdichip; MPN: FT232RQ; OC_FARNELL: 1146033; OC_NEWARK: 91K9919
DVL_TTL-TO-RS232 G1 U1 U$46 = texas
DVL_USB_HUB = smsc
JP1-JP4 = samtec
LED1-LED4 LED7-LED15 = led
U$1 U$33 = microchip
U$10 U$14 U$16 U$43 U$47 = connectors
U$11 U$24 U$25 U$44 U$48 U$68 = littelfuse
U$12 U$34 U$35 U$45 U$49 U$51 U$64-U$67 U$69-U$73 U$75-U$99 = avx
U$13 = nonelectrical_mounting
U$41 = infineon

## Nets
3V3 [med-pwr]: BATTERY-MUX.P$16 C28.1 D13.C D17.C D21.C D25.C DVL_USB_HUB.P$4 DVL_USB_HUB.P$10 DVL_USB_HUB.P$14 DVL_USB_HUB.P$18 DVL_USB_HUB.P$20 DVL_USB_HUB.P$27 JP1.18 JP1.38 JP1.58 JP1.78 JP2.18 JP2.38 JP2.58 JP2.78 JP3.18 JP3.38 JP3.58 JP3.78 JP4.18 JP4.38 JP4.58 JP4.78 LED8.A LED10.A LED12.A LED14.A R11.2 R62.1 R63.1 R64.1 R65.2 R66.2 U1.P$6 U1.P$8 U1.P$9 U1.P$10 U1.P$12 U1.P$16 U1.P$20 U1.P$25 U1.P$46 U1.P$47 U1.P$48 U$1.P$1 U$1.P$4 U$29.P$4 U$30.P$4 U$31.P$4 U$32.P$4 U$33.P$1 U$33.P$4 U$46.P$2 U$77.P$1 U$81.P$1 U$85.P$1 U$89.P$1
5V [med-pwr]: 5.0.P$1 5.0.P$2 5.1.P$1 5.1.P$2 BATTERY-MUX.P$3 C5.1 C6.1 C7.1 C9.1 C10.1 C11.1 C16.1 C17.2 C29.1 D2.C D3.C D10.C D12.C D16.C D20.C D24.C D36.C D37.C DVL_HOST_FTDI.1 DVL_HOST_FTDI.18 DVL_HOST_FTDI.19 DVL_SLAVE_FTDI.1 DVL_SLAVE_FTDI.18 DVL_SLAVE_FTDI.19 DVL_TTL-TO-RS232.11 DVL_TTL-TO-RS232.24 DVL_TTL-TO-RS232.25 G1.IN1 G1.IN2 JP1.17 JP1.37 JP1.57 JP1.77 JP2.17 JP2.37 JP2.57 JP2.77 JP3.17 JP3.37 JP3.57 JP3.77 JP4.17 JP4.37 JP4.57 JP4.77 R1.2 R4.2 R5.2 R6.2 R7.2 R8.1 R9.1 U$2.P$4 U$3.P$4 U$4.P$4 U$5.P$4 U$6.P$4 U$7.P$4 U$8.P$4 U$9.P$4 U$11.P$2 U$12.P$1 U$17.1 U$18.P$4 U$19.P$4 U$20.P$4 U$22.P$4 U$23.P$4 U$27.P$4 U$28.P$4 U$37.8 U$38.8 U$39.8 U$40.8 U$42.P$4 U$44.P$2 U$45.P$1 U$48.P$2 U$49.P$1 U$50.8 U$52.P$4 U$53.P$4 U$54.P$4 U$55.P$4 U$56.P$4 U$57.P$4 U$58.P$4 U$59.P$4 U$60.P$4 U$61.P$4 U$62.P$4 U$63.P$4 U$70.P$1 U$71.P$1 U$74.1 U$76.P$1 U$80.P$1 U$84.P$1 U$88.P$1 U$108.1
12V [high-pwr]: 2PIN_4.P$1 5.1.P$3 5.1.P$4 5.1.P$5 5.1.P$6 5.1.P$7 5.1.P$8 5.1.P$9 5.1.P$10 D4.C D5.C D6.C D7.C D11.C D15.C D19.C D23.C D27.C JP1.16 JP1.36 JP1.56 JP1.76 JP2.16 JP2.36 JP2.56 JP2.76 JP3.16 JP3.36 JP3.56 JP3.76 JP4.16 JP4.36 JP4.56 JP4.76 U$15.P$2 U$64.P$1 U$65.P$1 U$66.P$1 U$67.P$1 U$75.P$1 U$79.P$1 U$83.P$1 U$87.P$1 U$91.P$1
!EXT_USB_OVERCUR!: G1.!OC3! R66.1 U1.P$37
!EXT_USB_PWR!: G1.!EN3! U1.P$36
!USB_5_OVERCUR!: G1.!OC1! R64.2 U1.P$29
!USB_5_PWR!: G1.!EN1! U1.P$28
!USB_6_OVERCUR!: G1.!OC2! R65.1 U1.P$33
!USB_6_PWR!: G1.!EN2! U1.P$32
ACT-PWR_POST-KILL: ACT-PWR_OUT.P$1 ACT-PWR_OUT.P$2 D8.C U$41.DRAIN U$72.P$1
ACT-PWR_PRE-KILL: ACT-PWR_IN.P$1 ACT-PWR_IN.P$2 D1.C D9.C R61.2 U$41.S1 U$41.S2 U$41.S3 U$41.S4 U$41.S5 U$73.P$1
ACT_SCL: 5.4.P$9 5.4.P$10 JP1.24 JP2.24 JP3.24 JP4.24 U$63.P$2
ACT_SDA: 5.5.P$9 5.5.P$10 JP1.23 JP2.23 JP3.23 JP4.23 U$63.P$3
AHRS_USB_M: 2PIN_2.P$2 U$6.P$3 U$42.P$3 U$43.D+
AHRS_USB_P: 2PIN_2.P$1 U$6.P$2 U$42.P$2 U$43.D-
BATT1_SCL: 5.4.P$7 5.4.P$8 U$39.7 U$62.P$2
BATT1_SCL_UNBUF: BATTERY-MUX.P$7 U$39.6
BATT1_SDA: 5.5.P$7 5.5.P$8 U$39.2 U$62.P$3
BATT1_SDA_UNBUF: BATTERY-MUX.P$6 U$39.3
BATT2_SCL: 5.4.P$5 5.4.P$6 U$37.7 U$61.P$2
BATT2_SCL_UNBUF: BATTERY-MUX.P$10 U$37.6
BATT2_SDA: 5.5.P$5 5.5.P$6 U$37.2 U$61.P$3
BATT2_SDA_UNBUF: BATTERY-MUX.P$9 U$37.3
BATT_SCL: JP1.44 JP2.44 JP3.44 JP4.44 U$38.2
BATT_SCL_UNBUF: BATTERY-MUX.P$14 U$38.3
BATT_SDA: JP1.43 JP2.43 JP3.43 JP4.43 U$38.7
BATT_SDA_UNBUF: BATTERY-MUX.P$15 U$38.6
CANH: 2PIN_7.P$2 5.3.P$5 5.3.P$6 JP1.45 JP2.45 JP3.45 JP4.45 U$20.P$3 U$53.P$3
CANL: 2PIN_7.P$1 5.3.P$7 5.3.P$8 JP1.46 JP2.46 JP3.46 JP4.46 U$20.P$2 U$53.P$2
CE_2: JP1.52 JP2.52 JP3.52 JP4.52
CE_3: JP1.53 JP2.53 JP3.53 JP4.53
CE_4: JP1.54 JP2.54 JP3.54 JP4.54
CE_CPU: 4PIN_7.P$2 JP1.74 JP2.74 JP3.74 JP4.74
CE_LEDS: JP1.73 JP2.73 JP3.73 JP4.73 U$15.P$3 U$28.P$3
CTS_CF: 4PIN_2.P$1 JP1.13 JP2.13 JP3.13 JP4.13
CTS_MC: 4PIN_1.P$1 JP1.29 JP2.29 JP3.29 JP4.29
CTS_MD: 5.2.P$5 5.2.P$6 JP1.68 JP2.68 JP3.68 JP4.68 U$55.P$3
CTS_MF: JP1.5 JP2.5 JP3.5 JP4.5
CTS_PF: JP1.9 JP2.9 JP3.9 JP4.9
CTS_SF: JP1.50 JP2.50 JP3.50 JP4.50
DEPTH_SCL: R62.2 U$46.P$3 U$47.P$2
DEPTH_SDA: R63.2 U$46.P$4 U$47.P$3
DVL_H!CTS!: DVL_HOST_FTDI.8 DVL_TTL-TO-RS232.5
DVL_H!RTS!: DVL_HOST_FTDI.32 DVL_TTL-TO-RS232.20
DVL_HCTS: 5.6.P$7 5.6.P$8 DVL_TTL-TO-RS232.4 U$58.P$3
DVL_HRTS: 5.6.P$5 5.6.P$6 DVL_TTL-TO-RS232.1 U$57.P$2
DVL_HRX: 5.6.P$1 5.6.P$2 DVL_TTL-TO-RS232.9 U$56.P$3
DVL_HRXD: DVL_HOST_FTDI.2 DVL_TTL-TO-RS232.8
DVL_HTX: 5.6.P$3 5.6.P$4 DVL_TTL-TO-RS232.2 U$57.P$3
DVL_HTXD: DVL_HOST_FTDI.30 DVL_TTL-TO-RS232.7
DVL_HUSB_M: DVL_HOST_FTDI.15 R49.1 R50.1
DVL_HUSB_P: DVL_HOST_FTDI.14 R53.1 R54.1
DVL_S!CTS!: DVL_SLAVE_FTDI.8 DVL_TTL-TO-RS232.22
DVL_S!RTS!: DVL_SLAVE_FTDI.32 DVL_TTL-TO-RS232.21
DVL_SCTS: 5.7.P$9 5.7.P$10 DVL_TTL-TO-RS232.23 U$56.P$2
DVL_SRTS: 5.5.P$1 5.5.P$2 DVL_TTL-TO-RS232.28 U$59.P$3
DVL_SRX: 5.6.P$9 5.6.P$10 DVL_TTL-TO-RS232.27 U$58.P$2
DVL_SRXD: DVL_SLAVE_FTDI.2 DVL_TTL-TO-RS232.26
DVL_STX: 5.4.P$1 5.4.P$2 DVL_TTL-TO-RS232.3 U$59.P$2
DVL_STXD: DVL_SLAVE_FTDI.30 DVL_TTL-TO-RS232.6
DVL_SUSB_M: DVL_SLAVE_FTDI.15 R57.1 R58.1
DVL_SUSB_P: DVL_SLAVE_FTDI.14 R55.1 R56.1
DVL_USB_HUB_XTAL: DVL_USB_HUB.P$24 U$1.P$3
DVL_USB_M: 2PIN_5.P$2 R51.1 R52.1 U$7.P$3
DVL_USB_P: 2PIN_5.P$1 R59.1 R60.1 U$7.P$2
EXT_SCL: 5.3.P$3 5.3.P$4 JP1.34 JP2.34 JP3.34 JP4.34 U$52.P$2
EXT_SDA: 5.3.P$1 5.3.P$2 JP1.33 JP2.33 JP3.33 JP4.33 U$52.P$3
EXT_USB_5V [low-pwr]: 5.7.P$7 5.7.P$8 D41.C G1.OUT3 U$68.P$2 U$69.P$1
EXT_USB_M: 5.7.P$1 5.7.P$2 R34.2 R47.1 U$5.P$3
EXT_USB_P: 5.7.P$3 5.7.P$4 R35.2 R48.1 U$5.P$2
GND: 4PIN_5.P$1 4PIN_5.P$2 4PIN_5.P$3 4PIN_5.P$4 4PIN_6.P$1 4PIN_6.P$2 4PIN_6.P$3 4PIN_6.P$4 5.0.P$3 5.0.P$4 5.0.P$5 5.0.P$6 5.0.P$7 5.0.P$8 5.0.P$9 5.0.P$10 5.2.P$9 5.2.P$10 5.3.P$9 5.3.P$10 5.7.P$5 5.7.P$6 BATTERY-MUX.P$1 BATTERY-MUX.P$2 BATTERY-MUX.P$8 BATTERY-MUX.P$13 C1.2 C2.2 C3.2 C4.2 C5.2 C6.2 C7.2 C8.2 C9.2 C10.2 C11.2 C16.2 C19.1 C26.2 C27.2 C28.2 C29.2 C30.2 C31.2 C32.2 C33.2 C34.2 C35.2 C36.2 C37.2 C38.2 C39.2 C40.2 C41.2 C42.2 C43.2 C44.2 C45.2 C46.2 C47.2 C48.2 D2.A D3.A D4.A D5.A D6.A D7.A D8.A D9.A D10.A D11.A D12.A D13.A D14.A D15.A D16.A D17.A D18.A D19.A D20.A D21.A D22.A D23.A D24.A D25.A D26.A D27.A D28.A D29.A D30.A D31.A D32.A D33.A D34.A D35.A D36.A D37.A D39.A D40.A D41.A DVL_HOST_FTDI.4 DVL_HOST_FTDI.17 DVL_HOST_FTDI.20 DVL_HOST_FTDI.24 DVL_HOST_FTDI.26 DVL_SLAVE_FTDI.4 DVL_SLAVE_FTDI.17 DVL_SLAVE_FTDI.20 DVL_SLAVE_FTDI.24 DVL_SLAVE_FTDI.26 DVL_TTL-TO-RS232.10 DVL_USB_HUB.P$7 DVL_USB_HUB.P$11 DVL_USB_HUB.P$15 DVL_USB_HUB.P$29 G1.GND1 G1.GND2 JP1.1 JP1.15 JP1.19 JP1.20 JP1.21 JP1.25 JP1.32 JP1.35 JP1.39 JP1.40 JP1.42 JP1.47 JP1.55 JP1.59 JP1.60 JP1.62 JP1.75 JP1.79 JP1.80 JP1.P1,1 JP1.P1,2 JP1.P1,3 JP1.P1,4 JP1.P1,5 JP1.P1,6 JP2.1 JP2.15 JP2.19 JP2.20 JP2.21 JP2.25 JP2.32 JP2.35 JP2.39 JP2.40 JP2.42 JP2.47 JP2.55 JP2.59 JP2.60 JP2.62 JP2.75 JP2.79 JP2.80 JP2.P1,1 JP2.P1,2 JP2.P1,3 JP2.P1,4 JP2.P1,5 JP2.P1,6 JP3.1 JP3.15 JP3.19 JP3.20 JP3.21 JP3.25 JP3.32 JP3.35 JP3.39 JP3.40 JP3.42 JP3.47 JP3.55 JP3.59 JP3.60 JP3.62 JP3.75 JP3.79 JP3.80 JP3.P1,1 JP3.P1,2 JP3.P1,3 JP3.P1,4 JP3.P1,5 JP3.P1,6 JP4.1 JP4.15 JP4.19 JP4.20 JP4.21 JP4.25 JP4.32 JP4.35 JP4.39 JP4.40 JP4.42 JP4.47 JP4.55 JP4.59 JP4.60 JP4.62 JP4.75 JP4.79 JP4.80 JP4.P1,1 JP4.P1,2 JP4.P1,3 JP4.P1,4 JP4.P1,5 JP4.P1,6 LED9.C LED11.C LED13.C LED15.C R2.2 R10.1 R12.1 R13.2 R14.2 R15.2 R36.2 R37.2 R38.2 R39.2 R40.2 R41.2 R42.2 R43.2 R44.2 R45.2 R46.2 R47.2 R48.2 R50.2 R52.2 R54.2 R56.2 R58.2 R60.2 U1.P$5 U1.P$24 U1.P$43 U$1.P$2 U$2.P$1 U$3.P$1 U$4.P$1 U$5.P$1 U$6.P$1 U$7.P$1 U$8.P$1 U$9.P$1 U$11.P$1 U$12.P$2 U$15.P$1 U$18.P$1 U$19.P$1 U$20.P$1 U$21.1 U$22.P$1 U$23.P$1 U$24.P$1 U$25.P$1 U$26.1 U$27.P$1 U$28.P$1 U$29.P$1 U$30.P$1 U$31.P$1 U$32.P$1 U$33.P$2 U$34.P$2 U$35.P$2 U$36.1 U$37.4 U$38.4 U$39.4 U$40.4 U$42.P$1 U$44.P$1 U$45.P$2 U$46.P$1 U$48.P$1 U$49.P$2 U$50.4 U$51.P$2 U$52.P$1 U$53.P$1 U$54.P$1 U$55.P$1 U$56.P$1 U$57.P$1 U$58.P$1 U$59.P$1 U$60.P$1 U$61.P$1 U$62.P$1 U$63.P$1 U$64.P$2 U$65.P$2 U$66.P$2 U$67.P$2 U$68.P$1 U$69.P$2 U$70.P$2 U$71.P$2 U$72.P$2 U$73.P$2 U$75.P$2 U$76.P$2 U$77.P$2 U$78.P$2 U$79.P$2 U$80.P$2 U$81.P$2 U$82.P$2 U$83.P$2 U$84.P$2 U$85.P$2 U$86.P$2 U$87.P$2 U$88.P$2 U$89.P$2 U$90.P$2 U$91.P$2 U$92.P$2 U$93.P$2 U$94.P$2 U$95.P$2 U$96.P$2 U$97.P$2 U$98.P$2 U$99.P$2 U$100.P$1 U$100.P$2 U$100.P$3 U$100.P$4 U$100.P$5 U$100.P$6 U$100.P$7 U$100.P$8 U$101.1 U$103.1 U$104.1 U$105.1 U$106.1 U$109.1
GPIO_2: JP1.2 JP2.2 JP3.2 JP4.2
GPIO_22 [med-pwr]: JP1.22 JP2.22 JP3.22 JP4.22
GPIO_63: JP1.63 JP2.63 JP3.63 JP4.63
HUB_USB_M: 2PIN_1.P$2 R17.1 U$2.P$3
HUB_USB_P: 2PIN_1.P$1 R3.1 U$2.P$2
HUB_USB_XTAL: U1.P$45 U$33.P$3
IMU_USB_M: 2PIN_3.P$2 U$3.P$3 U$9.P$3 U$10.D+
IMU_USB_P: 2PIN_3.P$1 U$3.P$2 U$9.P$2 U$10.D-
INT_SCL: 2PIN_6.P$1 JP1.65 JP2.65 JP3.65 JP4.65 U$18.P$2 U$50.2
INT_SDA: 2PIN_6.P$2 JP1.64 JP2.64 JP3.64 JP4.64 U$18.P$3 U$50.7
KILL-SWT-GATE: 2PIN_4.P$2 D1.A R61.1 U$41.GATE
MISO: 4PIN_7.P$3 JP1.72 JP2.72 JP3.72 JP4.72 U$15.P$5 U$19.P$3 U$27.P$3
MOSI: 4PIN_7.P$4 JP1.71 JP2.71 JP3.71 JP4.71 U$15.P$6 U$19.P$2 U$27.P$2
N$3: C8.1 DVL_SLAVE_FTDI.16
N$4: DVL_SLAVE_FTDI.21 LED4.C
N$6: C2.1 R3.2 R16.2 U1.P$3
N$7: R16.1 U1.P$2
N$8: R18.1 U1.P$1
N$9: R19.1 U1.P$42
N$10: C3.1 R17.2 U1.P$4
N$11: LED8.C LED9.A R18.2
N$12: LED10.C LED11.A R19.2
N$13: LED14.C LED15.A R21.2
N$14: R21.1 U1.P$40
N$15: LED12.C LED13.A R20.2
N$16: C30.1 R22.2 U1.P$13
N$17: C31.1 R23.2 U1.P$14
N$18: C32.1 R24.2 U1.P$17
N$19: R20.1 U1.P$41
N$20: C34.1 R27.1 U1.P$21
N$21: C35.1 R26.1 U1.P$22
N$22: DVL_SLAVE_FTDI.22 LED3.C
N$23: LED3.A R6.1
N$24: LED4.A R7.1
N$25: C4.1 DVL_HOST_FTDI.16
N$27: U$10.VDD U$17.2
N$28: U$10.GND U$21.2
N$29: U$10.SHIELD U$10.SHIELD1 U$26.2
N$30: U$47.P$1 U$108.2
N$31: C18.1 DVL_TTL-TO-RS232.12
N$32: C18.2 DVL_TTL-TO-RS232.14
N$33: DVL_HOST_FTDI.21 LED2.C
N$34: DVL_HOST_FTDI.22 LED1.C
N$35: C20.2 DVL_TTL-TO-RS232.16
N$36: LED7.C R13.1
N$37: U$47.P$4 U$109.2
N$38: U$43.VDD U$74.2
N$39: R1.1 U$46.P$7 U$46.P$8 U$51.P$1
N$40: U$43.GND U$101.2
N$41: U$36.2 U$43.SHIELD U$43.SHIELD1
N$42: U$14.VDD U$107.2
N$43: LED1.A R4.1
N$44: LED2.A R5.1
N$45: DVL_USB_HUB.P$16 R10.2
N$46: DVL_USB_HUB.P$17 R11.1
N$47: C33.1 R25.2 U1.P$18
N$48: C36.1 R28.1 U1.P$26
N$49: DVL_USB_HUB.P$19 LED7.A R14.1
N$50: C38.1 R30.1 U1.P$30
N$51: C1.1 DVL_USB_HUB.P$2 R49.2
N$52: DVL_USB_HUB.P$23
N$53: C44.1 DVL_USB_HUB.P$21 R51.2
N$54: C26.1 DVL_USB_HUB.P$25
N$55: C17.1 DVL_TTL-TO-RS232.13
N$56: DVL_USB_HUB.P$26 R12.2
N$57: C20.1 DVL_TTL-TO-RS232.15
N$58: C37.1 R29.1 U1.P$27
N$59: C19.2 DVL_TTL-TO-RS232.17
N$60: C39.1 R31.1 U1.P$31
N$61: C40.1 R32.1 U1.P$34
N$62: C45.1 DVL_USB_HUB.P$3 R53.2
N$63: C41.1 R33.1 U1.P$35
N$67: C27.1 DVL_USB_HUB.P$9
N$68: C46.1 DVL_USB_HUB.P$1 R55.2
N$69: C47.1 DVL_USB_HUB.P$28 R57.2
N$70: C48.1 DVL_USB_HUB.P$22 R59.2
N$71: DVL_USB_HUB.P$13 R15.1
N$73: U$14.GND U$106.2
N$74: C42.1 R34.1 U1.P$38
N$75: C43.1 R35.1 U1.P$39
N$80: U$14.SHIELD U$14.SHIELD1 U$105.2
N$83: U$16.SHIELD U$16.SHIELD1 U$104.2
N$84: U$16.VDD U$102.2
N$85: U$16.GND U$103.2
PWM_0: JP1.31 JP2.31 JP3.31 JP4.31
PWM_1: JP1.26 JP2.26 JP3.26 JP4.26
RTS_CF: 4PIN_2.P$2 JP1.14 JP2.14 JP3.14 JP4.14
RTS_MC: 4PIN_1.P$2 JP1.30 JP2.30 JP3.30 JP4.30
RTS_MD: 5.2.P$7 5.2.P$8 JP1.69 JP2.69 JP3.69 JP4.69 U$55.P$2
RTS_MF: JP1.6 JP2.6 JP3.6 JP4.6
RTS_PF: JP1.10 JP2.10 JP3.10 JP4.10
RTS_SF: JP1.51 JP2.51 JP3.51 JP4.51
RX_CF: 4PIN_2.P$4 JP1.11 JP2.11 JP3.11 JP4.11 U$8.P$2
RX_MC: 4PIN_1.P$4 JP1.27 JP2.27 JP3.27 JP4.27 U$4.P$3
RX_MD: 5.2.P$1 5.2.P$2 JP1.66 JP2.66 JP3.66 JP4.66 U$54.P$2
RX_MF: JP1.3 JP2.3 JP3.3 JP4.3
RX_PF: JP1.7 JP2.7 JP3.7 JP4.7
RX_SF: JP1.48 JP2.48 JP3.48 JP4.48
SCL_1_UNBUF: R8.2 U$46.P$6 U$50.3
SDA_1_UNBUF: R9.2 U$46.P$5 U$50.6
SHORE_SCL: 5.4.P$3 5.4.P$4 U$40.7 U$60.P$2
SHORE_SCL_UNBUF: BATTERY-MUX.P$5 U$40.6
SHORE_SDA: 5.5.P$3 5.5.P$4 U$40.2 U$60.P$3
SHORE_SDA_UNBUF: BATTERY-MUX.P$4 U$40.3
SPI_CLK: 4PIN_7.P$1 JP1.70 JP2.70 JP3.70 JP4.70 U$15.P$4 U$28.P$2
TX_CF: 4PIN_2.P$3 JP1.12 JP2.12 JP3.12 JP4.12 U$8.P$3
TX_MC: 4PIN_1.P$3 JP1.28 JP2.28 JP3.28 JP4.28 U$4.P$2
TX_MD: 5.2.P$3 5.2.P$4 JP1.67 JP2.67 JP3.67 JP4.67 U$54.P$3
TX_MF: JP1.4 JP2.4 JP3.4 JP4.4
TX_PF: JP1.8 JP2.8 JP3.8 JP4.8
TX_SF: JP1.49 JP2.49 JP3.49 JP4.49
USB-5_P: R31.2 R44.1
USB_1_N: JP1.61 R2.1 R22.1 U$29.P$3
USB_1_P: JP1.41 R23.1 R36.1 U$29.P$2
USB_2_N: JP2.61 R24.1 R37.1 U$30.P$3
USB_2_P: JP2.41 R25.1 R38.1 U$30.P$2
USB_3_N: JP3.61 R27.2 R40.1 U$31.P$3
USB_3_P: JP3.41 R26.2 R39.1 U$31.P$2
USB_4_N: JP4.61 R28.2 R41.1 U$32.P$3
USB_4_P: JP4.41 R29.2 R42.1 U$32.P$2
USB_5_5V [low-pwr]: D40.C G1.OUT1 U$24.P$2 U$34.P$1 U$107.1
USB_5_M: R30.2 R43.1 U$14.D+ U$22.P$3
USB_5_P: U$14.D- U$22.P$2
USB_6_5V [low-pwr]: D39.C G1.OUT2 U$25.P$2 U$35.P$1 U$102.1
USB_6_M: R32.2 R45.1 U$16.D+ U$23.P$3
USB_6_P: R33.2 R46.1 U$16.D- U$23.P$2
V_BATT [high-pwr]: 4PIN_3.P$1 4PIN_3.P$2 4PIN_3.P$3 4PIN_3.P$4 4PIN_4.P$1 4PIN_4.P$2 4PIN_4.P$3 4PIN_4.P$4 D14.C D18.C D22.C D26.C D28.C D29.C D30.C D31.C D32.C D33.C D34.C D35.C JP1.P2,1 JP1.P2,2 JP1.P2,3 JP1.P2,4 JP1.P2,5 JP1.P2,6 JP2.P2,1 JP2.P2,2 JP2.P2,3 JP2.P2,4 JP2.P2,5 JP2.P2,6 JP3.P2,1 JP3.P2,2 JP3.P2,3 JP3.P2,4 JP3.P2,5 JP3.P2,6 JP4.P2,1 JP4.P2,2 JP4.P2,3 JP4.P2,4 JP4.P2,5 JP4.P2,6 U$78.P$1 U$82.P$1 U$86.P$1 U$90.P$1 U$92.P$1 U$93.P$1 U$94.P$1 U$95.P$1 U$96.P$1 U$97.P$1 U$98.P$1 U$99.P$1

## Tracks (layer width: path | path; a pad name or v marks a point on that pad's centre or on a via)
3V3  (46 unrouted)
  Route15 1.27: JP1.18 JP1.38 JP1.58 JP1.78 JP2.18 JP2.38 JP2.58 JP2.78 JP3.18 JP3.38 JP3.58 JP3.78 JP4.18 JP4.38 JP4.58 JP4.78
5V  (89 unrouted)
  Route15 1.27: JP4.77 JP4.57 JP4.37 JP4.17 JP3.77 JP3.57 JP3.37 JP3.17 JP2.77 JP2.57 JP2.37 JP2.17 JP1.77 JP1.57 JP1.37 JP1.17
12V  (28 unrouted)
  Route15 1.27: JP1.16 JP1.36 JP1.56 JP1.76 JP2.16 JP2.36 JP2.56 JP2.76 JP3.16 JP3.36 JP3.56 JP3.76 JP4.16 JP4.36 JP4.56 JP4.76
!EXT_USB_OVERCUR!  (2 unrouted)
!EXT_USB_PWR!  (1 unrouted)
!USB_5_OVERCUR!  (2 unrouted)
!USB_5_PWR!  (1 unrouted)
!USB_6_OVERCUR!  (2 unrouted)
!USB_6_PWR!  (1 unrouted)
ACT-PWR_POST-KILL  (via drill 0.6)  (2 unrouted)
  other vias: 77.47,25.4 74.93,24.13 77.47,22.86 77.47,20.32 74.93,19.05 77.47,17.78 91.44,17.78 93.98,17.78 96.52,17.78 95.25,20.32 92.71,20.32 92.71,22.86 95.25,22.86 96.52,25.4 93.98,25.4 91.44,25.4
  pour Bottom: 73.66,26.67 97.79,26.67 97.79,4.45 73.66,4.45
  pour Route15: 73.66,26.67 97.79,26.67 97.79,4.45 73.66,4.45
ACT-PWR_PRE-KILL  (via drill 0.6)  (4 unrouted)
  other vias: 96.52,29.21 93.98,29.21 91.44,29.21 92.71,31.75 95.25,31.75 96.52,34.29 93.98,34.29 91.44,34.29 88.9,34.29 86.36,34.29 83.82,34.29 81.28,34.29 78.74,34.29 76.2,34.29
  pour Bottom: 74.93,43.18 97.79,43.18 97.79,27.94 81.28,27.94 81.28,33.66 74.93,33.66
  pour Route15: 74.93,43.18 97.79,43.18 97.79,27.94 81.28,27.94 81.28,33.66 74.93,33.66
ACT_SCL  (5 unrouted)
  Route2 0.152: 5.4.P$10 5.4.P$9
ACT_SDA  (6 unrouted)
AHRS_USB_M  (3 unrouted)
AHRS_USB_P  (3 unrouted)
BATT1_SCL  (2 unrouted)
  Route2 0.152: 5.4.P$8 5.4.P$7
BATT1_SCL_UNBUF  (1 unrouted)
BATT1_SDA  (3 unrouted)
BATT1_SDA_UNBUF  (1 unrouted)
BATT2_SCL  (2 unrouted)
  Route2 0.152: 5.4.P$6 5.4.P$5
BATT2_SCL_UNBUF  (1 unrouted)
BATT2_SDA  (3 unrouted)
BATT2_SDA_UNBUF  (1 unrouted)
BATT_SCL  (4 unrouted)
BATT_SCL_UNBUF  (1 unrouted)
BATT_SDA  (4 unrouted)
BATT_SDA_UNBUF  (1 unrouted)
CANH  (8 unrouted)
CANL  (8 unrouted)
CE_2  (3 unrouted)
CE_3  (3 unrouted)
CE_4  (3 unrouted)
CE_CPU  (2 unrouted)
  Bottom 0.152: JP1.74 60.77,80.07 | 61.72,81.03 61.72,87.19 JP2.74 60.77,104.97 61.72,105.92 61.72,112.09 JP3.74 60.77,129.86 61.72,130.81 61.72,136.99 JP4.74
CE_LEDS  (5 unrouted)
CTS_CF  (4 unrouted)
CTS_MC  (4 unrouted)
CTS_MD  (5 unrouted)
  Route2 0.152: 5.2.P$6 5.2.P$5
CTS_MF  (3 unrouted)
CTS_PF  (3 unrouted)
CTS_SF  (3 unrouted)
DEPTH_SCL  (2 unrouted)
DEPTH_SDA  (2 unrouted)
DVL_H!CTS!  (1 unrouted)
DVL_H!RTS!  (1 unrouted)
DVL_HCTS  (2 unrouted)
  Route2 0.152: 5.6.P$8 5.6.P$7
DVL_HRTS  (2 unrouted)
  Route2 0.152: 5.6.P$6 5.6.P$5
DVL_HRX  (2 unrouted)
  Route2 0.152: 5.6.P$2 5.6.P$1
DVL_HRXD  (1 unrouted)
DVL_HTX  (2 unrouted)
  Route2 0.152: 5.6.P$4 5.6.P$3
DVL_HTXD  (1 unrouted)
DVL_HUSB_M  (2 unrouted)
DVL_HUSB_P  (2 unrouted)
DVL_S!CTS!  (1 unrouted)
DVL_S!RTS!  (1 unrouted)
DVL_SCTS  (3 unrouted)
DVL_SRTS  (3 unrouted)
DVL_SRX  (2 unrouted)
  Route2 0.152: 5.6.P$10 5.6.P$9
DVL_SRXD  (1 unrouted)
DVL_STX  (2 unrouted)
  Route2 0.152: 5.4.P$2 5.4.P$1
DVL_STXD  (1 unrouted)
DVL_SUSB_M  (2 unrouted)
DVL_SUSB_P  (2 unrouted)
DVL_USB_HUB_XTAL  (1 unrouted)
DVL_USB_M  (3 unrouted)
DVL_USB_P  (3 unrouted)
EXT_SCL  (6 unrouted)
EXT_SDA  (6 unrouted)
EXT_USB_5V  (5 unrouted)
EXT_USB_M  (4 unrouted)
EXT_USB_P  (4 unrouted)
GND  (237 unrouted)
  pour Route2: 5.08,2.54 96.52,2.54 96.52,5.08 100.33,5.08 100.33,149.86 97.79,149.86 97.79,152.4 34.29,152.4 34.29,140.97 19.05,140.97 19.05,138.43 19.05,46.99 16.51,46.99 16.51,34.29 2.54,34.29 2.54,33.02 2.54,5.08 5.08,5.08
GPIO_2  (3 unrouted)
GPIO_22  (3 unrouted)
GPIO_63  (3 unrouted)
HUB_USB_M  (2 unrouted)
HUB_USB_P  (2 unrouted)
HUB_USB_XTAL  (1 unrouted)
IMU_USB_M  (3 unrouted)
IMU_USB_P  (3 unrouted)
INT_SCL  (6 unrouted)
INT_SDA  (6 unrouted)
KILL-SWT-GATE  (2 unrouted)
  Bottom 0.61: 2PIN_4.P$2 80.46,30.48 U$41.GATE
MISO  (7 unrouted)
MOSI  (7 unrouted)
N$3  (1 unrouted)
N$4  (1 unrouted)
N$6  (3 unrouted)
N$7  (1 unrouted)
N$8  (1 unrouted)
N$9  (1 unrouted)
N$10  (2 unrouted)
N$11  (2 unrouted)
N$12  (2 unrouted)
N$13  (2 unrouted)
N$14  (1 unrouted)
N$15  (2 unrouted)
N$16  (2 unrouted)
N$17  (2 unrouted)
N$18  (2 unrouted)
N$19  (1 unrouted)
N$20  (2 unrouted)
N$21  (2 unrouted)
N$22  (1 unrouted)
N$23  (1 unrouted)
N$24  (1 unrouted)
N$25  (1 unrouted)
N$27  (1 unrouted)
N$28  (1 unrouted)
N$29  (2 unrouted)
N$30  (1 unrouted)
N$31  (1 unrouted)
N$32  (1 unrouted)
N$33  (1 unrouted)
N$34  (1 unrouted)
N$35  (1 unrouted)
N$36  (1 unrouted)
N$37  (1 unrouted)
N$38  (1 unrouted)
N$39  (3 unrouted)
N$40  (1 unrouted)
N$41  (2 unrouted)
N$42  (1 unrouted)
N$43  (1 unrouted)
N$44  (1 unrouted)
N$45  (1 unrouted)
N$46  (1 unrouted)
N$47  (2 unrouted)
N$48  (2 unrouted)
N$49  (2 unrouted)
N$50  (2 unrouted)
N$51  (2 unrouted)
N$53  (2 unrouted)
N$54  (1 unrouted)
N$55  (1 unrouted)
N$56  (1 unrouted)
N$57  (1 unrouted)
N$58  (2 unrouted)
N$59  (1 unrouted)
N$60  (2 unrouted)
N$61  (2 unrouted)
N$62  (2 unrouted)
N$63  (2 unrouted)
N$67  (1 unrouted)
N$68  (2 unrouted)
N$69  (2 unrouted)
N$70  (2 unrouted)
N$71  (1 unrouted)
N$73  (1 unrouted)
N$74  (2 unrouted)
N$75  (2 unrouted)
N$80  (2 unrouted)
N$83  (2 unrouted)
N$84  (1 unrouted)
N$85  (1 unrouted)
PWM_0  (3 unrouted)
PWM_1  (3 unrouted)
RTS_CF  (4 unrouted)
RTS_MC  (4 unrouted)
RTS_MD  (5 unrouted)
  Route2 0.152: 5.2.P$8 5.2.P$7
RTS_MF  (3 unrouted)
RTS_PF  (3 unrouted)
RTS_SF  (3 unrouted)
RX_CF  (5 unrouted)
RX_MC  (5 unrouted)
RX_MD  (5 unrouted)
  Route2 0.152: 5.2.P$2 5.2.P$1
RX_MF  (3 unrouted)
RX_PF  (3 unrouted)
RX_SF  (3 unrouted)
SCL_1_UNBUF  (2 unrouted)
SDA_1_UNBUF  (2 unrouted)
SHORE_SCL  (2 unrouted)
  Route2 0.152: 5.4.P$4 5.4.P$3
SHORE_SCL_UNBUF  (1 unrouted)
SHORE_SDA  (3 unrouted)
SHORE_SDA_UNBUF  (1 unrouted)
SPI_CLK  (6 unrouted)
TX_CF  (5 unrouted)
TX_MC  (5 unrouted)
TX_MD  (5 unrouted)
  Route2 0.152: 5.2.P$4 5.2.P$3
TX_MF  (3 unrouted)
TX_PF  (3 unrouted)
TX_SF  (3 unrouted)
USB-5_P  (1 unrouted)
USB_1_N  (3 unrouted)
USB_1_P  (3 unrouted)
USB_2_N  (3 unrouted)
USB_2_P  (3 unrouted)
USB_3_N  (3 unrouted)
USB_3_P  (3 unrouted)
USB_4_N  (3 unrouted)
USB_4_P  (3 unrouted)
USB_5_5V  (4 unrouted)
USB_5_M  (3 unrouted)
USB_5_P  (1 unrouted)
USB_6_5V  (4 unrouted)
USB_6_M  (3 unrouted)
USB_6_P  (3 unrouted)
V_BATT  (24 unrouted)
  pour Route15: 74.93,53.34 100.33,53.34 100.33,138.43 74.93,138.43